# EAGLE board working (EAGLE 9.6.0), part 1 of 4
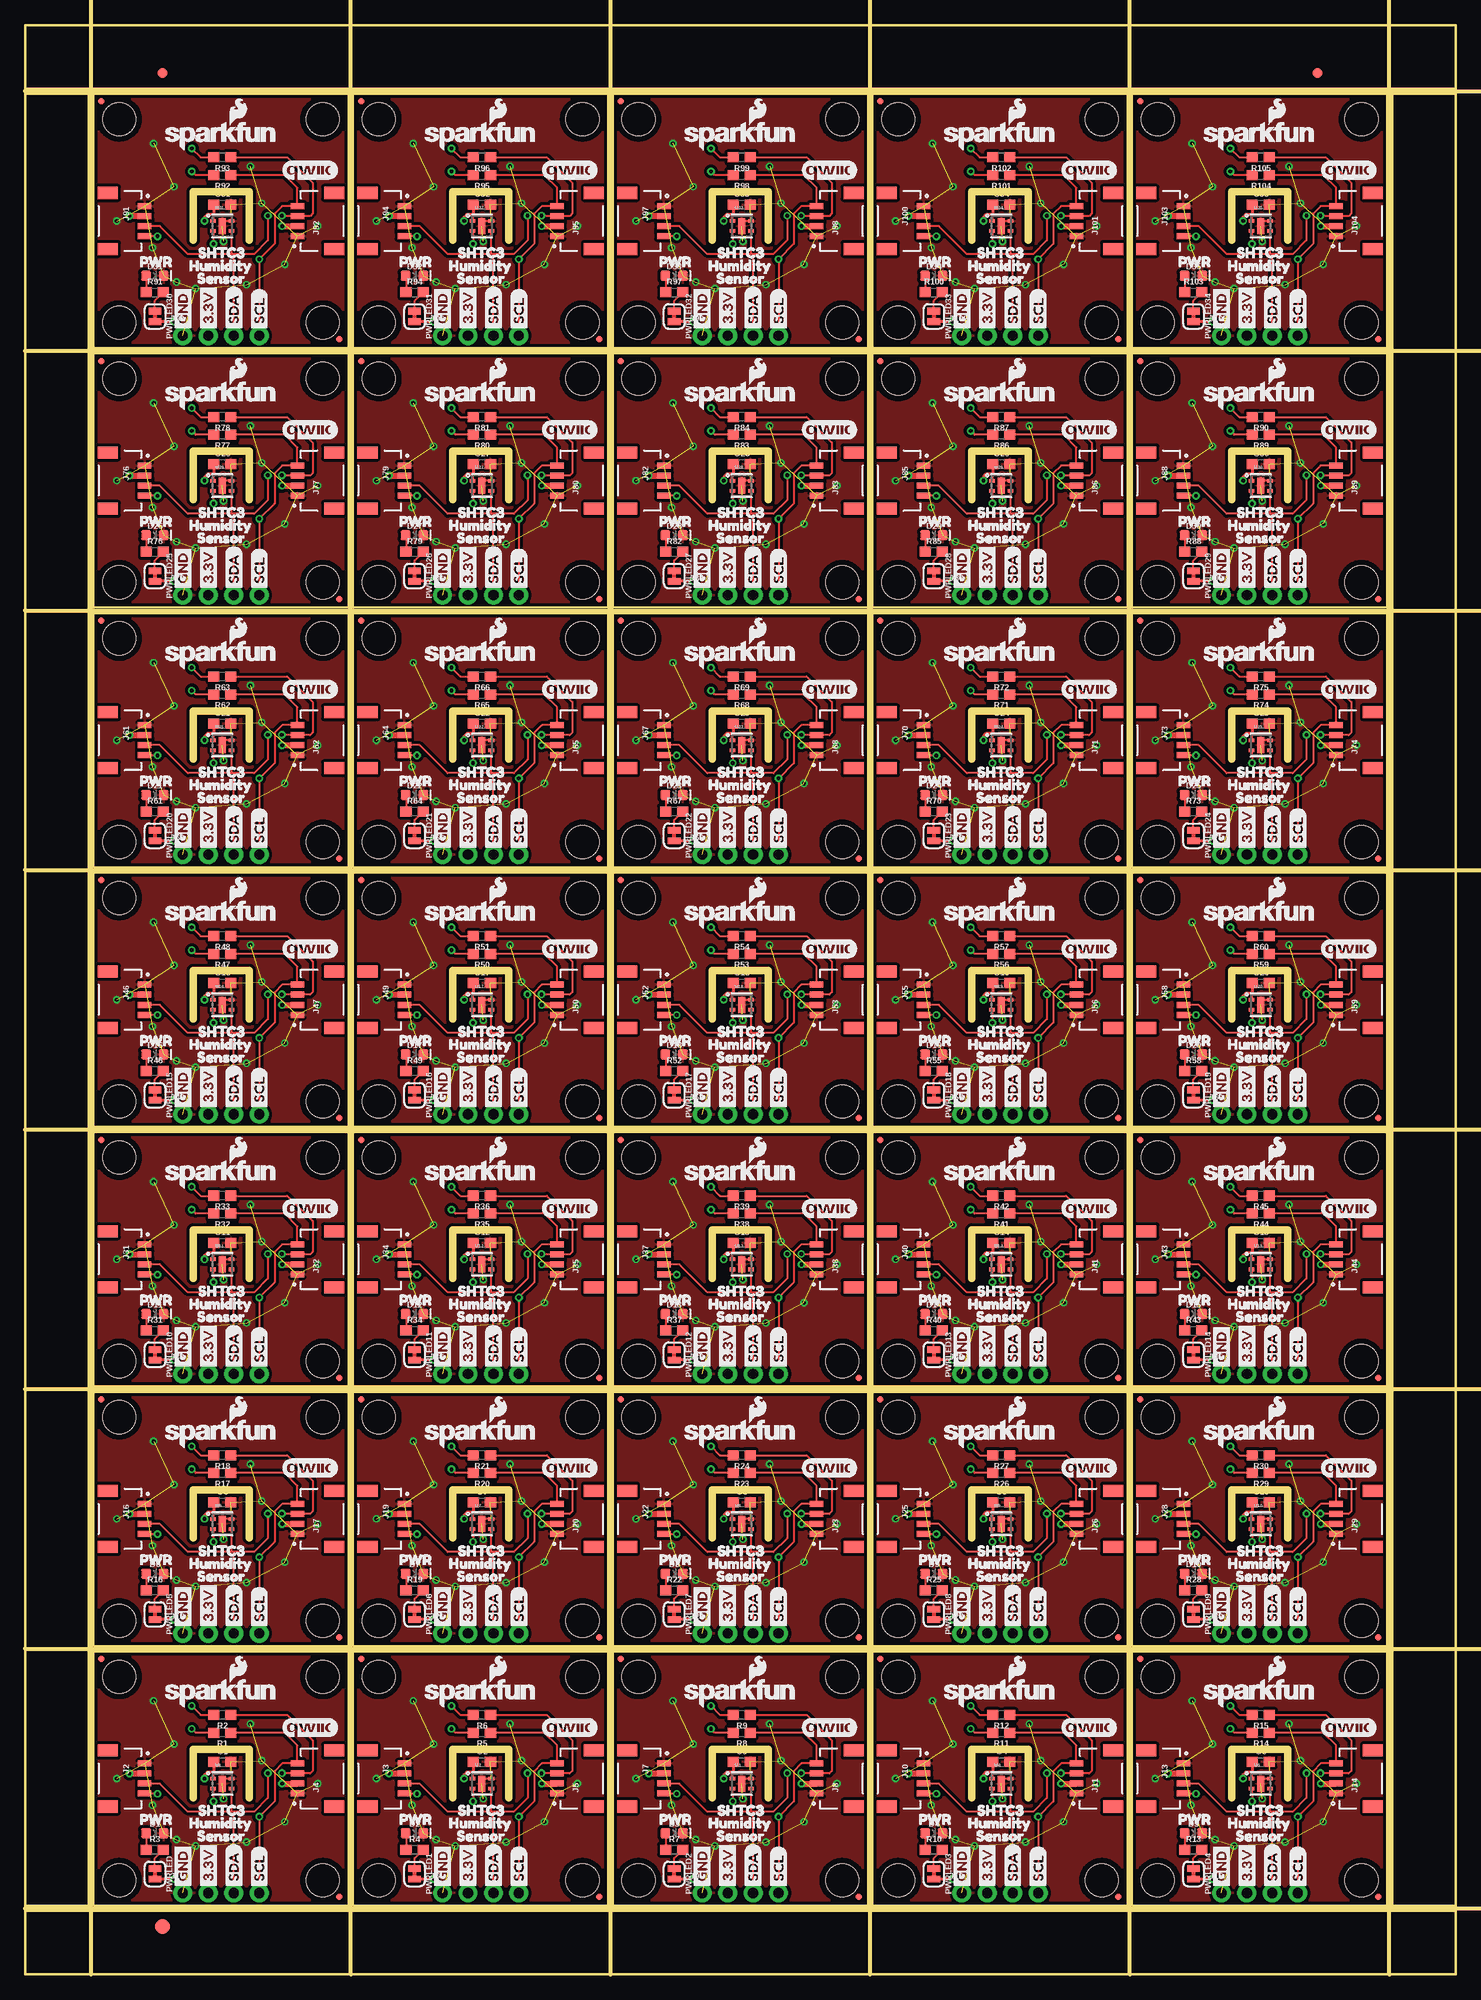
[diagram p0: board, top side]
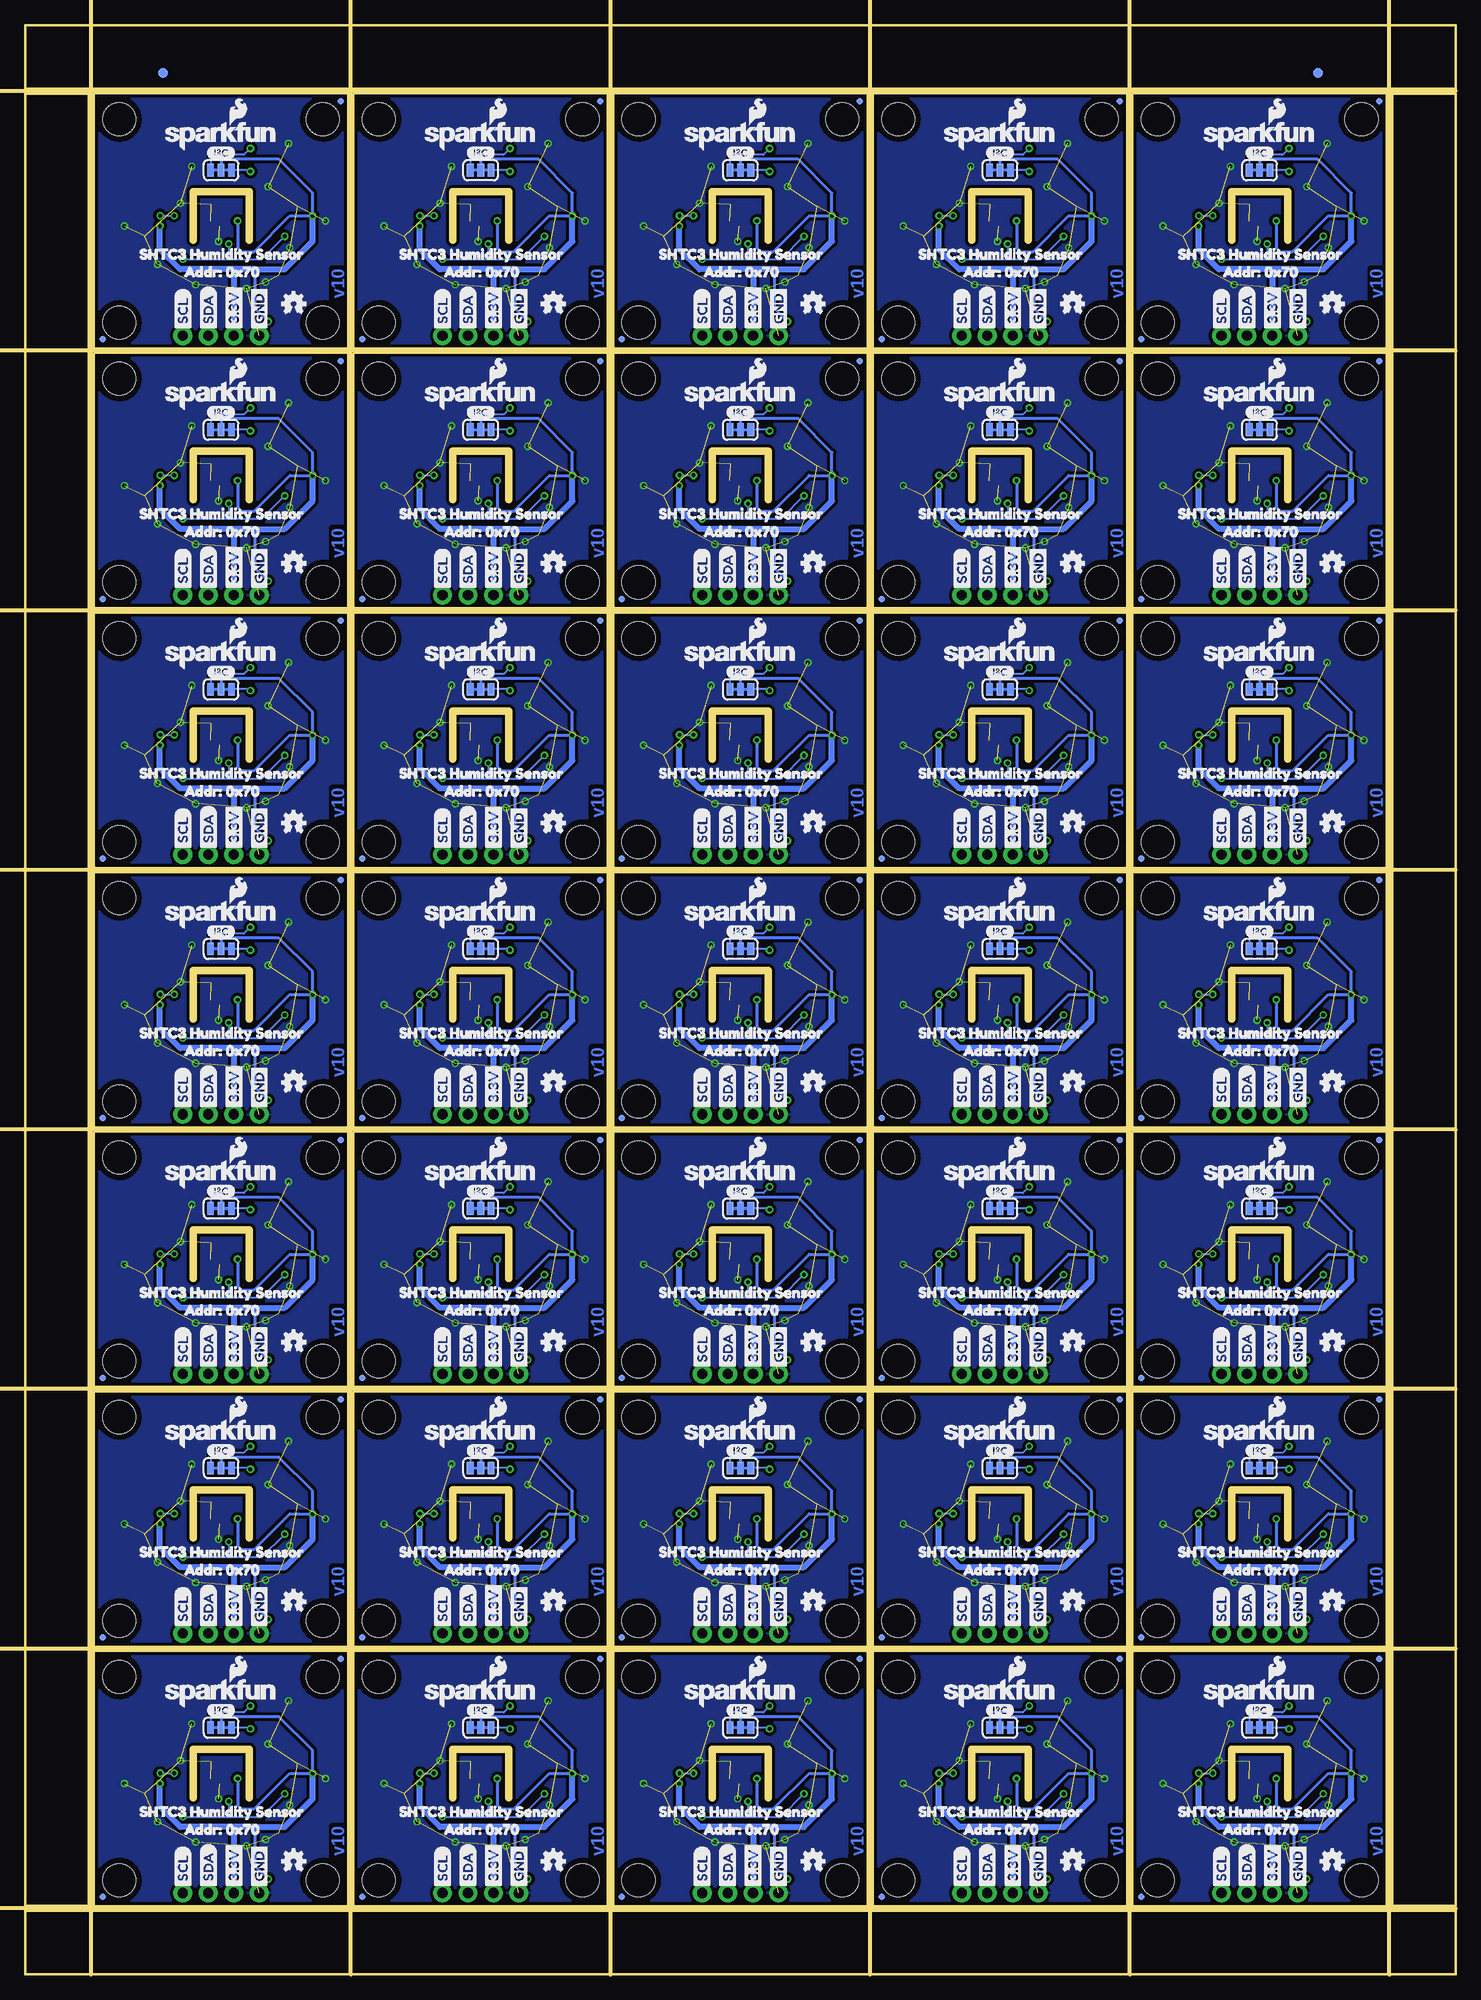
[diagram p1: board, bottom side, seen from below]

Size 142.75 x 194.56 mm. Coordinates in mm from the lower left corner, seen from the top.
Outline: 6.86,6.86 6.86,32.26 32.26,32.26 32.26,6.86 6.86,6.86
Outline: 32.77,6.86 32.77,32.26 58.17,32.26 58.17,6.86 32.77,6.86
Outline: 58.67,6.86 58.67,32.26 84.07,32.26 84.07,6.86 58.67,6.86
Outline: 84.58,6.86 84.58,32.26 109.98,32.26 109.98,6.86 84.58,6.86
Outline: 110.49,6.86 110.49,32.26 135.89,32.26 135.89,6.86 110.49,6.86
Outline: 6.86,32.77 6.86,58.17 32.26,58.17 32.26,32.77 6.86,32.77
Outline: 32.77,32.77 32.77,58.17 58.17,58.17 58.17,32.77 32.77,32.77
Outline: 58.67,32.77 58.67,58.17 84.07,58.17 84.07,32.77 58.67,32.77
Outline: 84.58,32.77 84.58,58.17 109.98,58.17 109.98,32.77 84.58,32.77
Outline: 110.49,32.77 110.49,58.17 135.89,58.17 135.89,32.77 110.49,32.77
Outline: 6.86,58.67 6.86,84.07 32.26,84.07 32.26,58.67 6.86,58.67
Outline: 32.77,58.67 32.77,84.07 58.17,84.07 58.17,58.67 32.77,58.67
Outline: 58.67,58.67 58.67,84.07 84.07,84.07 84.07,58.67 58.67,58.67
Outline: 84.58,58.67 84.58,84.07 109.98,84.07 109.98,58.67 84.58,58.67
Outline: 110.49,58.67 110.49,84.07 135.89,84.07 135.89,58.67 110.49,58.67
Outline: 6.86,84.58 6.86,109.98 32.26,109.98 32.26,84.58 6.86,84.58
Outline: 32.77,84.58 32.77,109.98 58.17,109.98 58.17,84.58 32.77,84.58
Outline: 58.67,84.58 58.67,109.98 84.07,109.98 84.07,84.58 58.67,84.58
Outline: 84.58,84.58 84.58,109.98 109.98,109.98 109.98,84.58 84.58,84.58
Outline: 110.49,84.58 110.49,109.98 135.89,109.98 135.89,84.58 110.49,84.58
Outline: 6.86,110.49 6.86,135.89 32.26,135.89 32.26,110.49 6.86,110.49
Outline: 32.77,110.49 32.77,135.89 58.17,135.89 58.17,110.49 32.77,110.49
Outline: 58.67,110.49 58.67,135.89 84.07,135.89 84.07,110.49 58.67,110.49
Outline: 84.58,110.49 84.58,135.89 109.98,135.89 109.98,110.49 84.58,110.49
Outline: 110.49,110.49 110.49,135.89 135.89,135.89 135.89,110.49 110.49,110.49
Outline: 6.86,136.4 6.86,161.8 32.26,161.8 32.26,136.4 6.86,136.4
Outline: 32.77,136.4 32.77,161.8 58.17,161.8 58.17,136.4 32.77,136.4
Outline: 58.67,136.4 58.67,161.8 84.07,161.8 84.07,136.4 58.67,136.4
Outline: 84.58,136.4 84.58,161.8 109.98,161.8 109.98,136.4 84.58,136.4
Outline: 110.49,136.4 110.49,161.8 135.89,161.8 135.89,136.4 110.49,136.4
Outline: 6.86,162.31 6.86,187.71 32.26,187.71 32.26,162.31 6.86,162.31
Outline: 32.77,162.31 32.77,187.71 58.17,187.71 58.17,162.31 32.77,162.31
Outline: 58.67,162.31 58.67,187.71 84.07,187.71 84.07,162.31 58.67,162.31
Outline: 84.58,162.31 84.58,187.71 109.98,187.71 109.98,162.31 84.58,162.31
Outline: 110.49,162.31 110.49,187.71 135.89,187.71 135.89,162.31 110.49,162.31
Outline: 0,6.35 142.75,6.35 142.75,0 0,0 0,6.35
Outline: 136.4,187.71 142.75,187.71 142.75,6.86 136.4,6.86 136.4,187.71
Outline: 0,194.56 142.75,194.56 142.75,188.21 0,188.21 0,194.56
Outline: 0,187.71 6.35,187.71 6.35,6.86 0,6.86 0,187.71
Copper layers (1*16): Top 0.035mm / dielectric 1.5mm / Bottom 0.035mm
Design rules "SHTC3": minimum track width 7mil, minimum drill 15mil, track to track 7mil, track to pad 7mil, pad to pad 7mil, via to via 7mil, smd to smd 7mil, copper to edge 7mil, drill to drill 7mil, minimum pad ring 7mil, minimum via ring 7mil, stop-mask expansion 4mil, vias tented up to drill 25mil, thermal gap 10mil
tRestrict: 105 lines
bRestrict: 105 lines
Milling: 119 lines

## Footprints (pad centres in the part's own frame; a part is rotated, then mirrored left to right if it is on the bottom)
0603 = smd 1.1 x 1: 1 -0.85,0; 2 0.85,0
LED-0603 = smd 1 x 1: A -0.877,0; C 0.877,0
FIDUCIAL-1X2 = smd 1 x 1: 1 0,0
FIDUCIAL-1.5X3 = smd 1.5 x 1.5: 1 0,0
SMT-JUMPER_3_2-NC_TRACE_SILK = smd 0.66 x 1.27: 1 -1.041,0; 2 0,0; 3 1.041,0
1X04_NO_SILK = drill 1.016 pad 1.88: 1 0,0; 2 2.54,0; 3 5.08,0; 4 7.62,0
JST04_1MM_RA = smd 0.6 x 1.35: 1 -1.5,0; 2 -0.5,0; 3 0.5,0; 4 1.5,0 | smd 1.2 x 2: NC1 2.8,-3.675; NC2 -2.8,-3.675
MICRO-FIDUCIAL = smd 0.635 x 0.635: 1 0,0
STAND-OFF = hole 3.302: 0,0
SMT-JUMPER_2_NC_TRACE_SILK = smd 0.66 x 1.27: 1 -0.521,0; 2 0.521,0
SHTC3 = smd 0.55 x 0.35: 1 -0.925,0.5; 2 -0.925,-0.5; 3 0.925,-0.5; 4 0.925,0.5 | smd 0.7 x 1.6: 5 0,0

## Placement (x,y rotation side)
C1  0.1uF  [0603]  19.68,21.21 0 top
C2  0.1uF  [0603]  45.59,21.21 0 top
C3  0.1uF  [0603]  71.5,21.21 0 top
C4  0.1uF  [0603]  97.41,21.21 0 top
C5  0.1uF  [0603]  123.32,21.21 0 top
C6  0.1uF  [0603]  19.68,47.12 0 top
C7  0.1uF  [0603]  45.59,47.12 0 top
C8  0.1uF  [0603]  71.5,47.12 0 top
C9  0.1uF  [0603]  97.41,47.12 0 top
C10  0.1uF  [0603]  123.32,47.12 0 top
C11  0.1uF  [0603]  19.68,73.03 0 top
C12  0.1uF  [0603]  45.59,73.03 0 top
C13  0.1uF  [0603]  71.5,73.03 0 top
C14  0.1uF  [0603]  97.41,73.03 0 top
C15  0.1uF  [0603]  123.32,73.03 0 top
C16  0.1uF  [0603]  19.68,98.93 0 top
C17  0.1uF  [0603]  45.59,98.93 0 top
C18  0.1uF  [0603]  71.5,98.93 0 top
C19  0.1uF  [0603]  97.41,98.93 0 top
C20  0.1uF  [0603]  123.32,98.93 0 top
C21  0.1uF  [0603]  19.68,124.84 0 top
C22  0.1uF  [0603]  45.59,124.84 0 top
C23  0.1uF  [0603]  71.5,124.84 0 top
C24  0.1uF  [0603]  97.41,124.84 0 top
C25  0.1uF  [0603]  123.32,124.84 0 top
C26  0.1uF  [0603]  19.68,150.75 0 top
C27  0.1uF  [0603]  45.59,150.75 0 top
C28  0.1uF  [0603]  71.5,150.75 0 top
C29  0.1uF  [0603]  97.41,150.75 0 top
C30  0.1uF  [0603]  123.32,150.75 0 top
C31  0.1uF  [0603]  19.68,176.66 0 top
C32  0.1uF  [0603]  45.59,176.66 0 top
C33  0.1uF  [0603]  71.5,176.66 0 top
C34  0.1uF  [0603]  97.41,176.66 0 top
C35  0.1uF  [0603]  123.32,176.66 0 top
D1  RED  [LED-0603]  12.95,14.1 0 top
D2  RED  [LED-0603]  38.86,14.1 0 top
D3  RED  [LED-0603]  64.77,14.1 0 top
D4  RED  [LED-0603]  90.68,14.1 0 top
D5  RED  [LED-0603]  116.59,14.1 0 top
D6  RED  [LED-0603]  12.95,40 0 top
D7  RED  [LED-0603]  38.86,40 0 top
D8  RED  [LED-0603]  64.77,40 0 top
D9  RED  [LED-0603]  90.68,40 0 top
D10  RED  [LED-0603]  116.59,40 0 top
D11  RED  [LED-0603]  12.95,65.91 0 top
D12  RED  [LED-0603]  38.86,65.91 0 top
D13  RED  [LED-0603]  64.77,65.91 0 top
D14  RED  [LED-0603]  90.68,65.91 0 top
D15  RED  [LED-0603]  116.59,65.91 0 top
D16  RED  [LED-0603]  12.95,91.82 0 top
D17  RED  [LED-0603]  38.86,91.82 0 top
D18  RED  [LED-0603]  64.77,91.82 0 top
D19  RED  [LED-0603]  90.68,91.82 0 top
D20  RED  [LED-0603]  116.59,91.82 0 top
D21  RED  [LED-0603]  12.95,117.73 0 top
D22  RED  [LED-0603]  38.86,117.73 0 top
D23  RED  [LED-0603]  64.77,117.73 0 top
D24  RED  [LED-0603]  90.68,117.73 0 top
D25  RED  [LED-0603]  116.59,117.73 0 top
D26  RED  [LED-0603]  12.95,143.64 0 top
D27  RED  [LED-0603]  38.86,143.64 0 top
D28  RED  [LED-0603]  64.77,143.64 0 top
D29  RED  [LED-0603]  90.68,143.64 0 top
D30  RED  [LED-0603]  116.59,143.64 0 top
D31  RED  [LED-0603]  12.95,169.55 0 top
D32  RED  [LED-0603]  38.86,169.55 0 top
D33  RED  [LED-0603]  64.77,169.55 0 top
D34  RED  [LED-0603]  90.68,169.55 0 top
D35  RED  [LED-0603]  116.59,169.55 0 top
E$1  [FIDUCIAL-1X2]  13.72,189.8 0 top
E$2  [FIDUCIAL-1X2]  13.72,189.8 0 bottom
E$3  [FIDUCIAL-1X2]  128.97,189.8 0 top
E$4  [FIDUCIAL-1X2]  128.97,189.8 0 bottom
E$5  [FIDUCIAL-1.5X3]  13.72,4.76 0 top
I2C  JUMPER-SMT_3_2-NC_TRACE_SILK  [SMT-JUMPER_3_2-NC_TRACE_SILK]  19.56,24.64 0 bottom
I2C1  JUMPER-SMT_3_2-NC_TRACE_SILK  [SMT-JUMPER_3_2-NC_TRACE_SILK]  45.47,24.64 0 bottom
I2C2  JUMPER-SMT_3_2-NC_TRACE_SILK  [SMT-JUMPER_3_2-NC_TRACE_SILK]  71.37,24.64 0 bottom
I2C3  JUMPER-SMT_3_2-NC_TRACE_SILK  [SMT-JUMPER_3_2-NC_TRACE_SILK]  97.28,24.64 0 bottom
I2C4  JUMPER-SMT_3_2-NC_TRACE_SILK  [SMT-JUMPER_3_2-NC_TRACE_SILK]  123.19,24.64 0 bottom
I2C5  JUMPER-SMT_3_2-NC_TRACE_SILK  [SMT-JUMPER_3_2-NC_TRACE_SILK]  19.56,50.55 0 bottom
I2C6  JUMPER-SMT_3_2-NC_TRACE_SILK  [SMT-JUMPER_3_2-NC_TRACE_SILK]  45.47,50.55 0 bottom
I2C7  JUMPER-SMT_3_2-NC_TRACE_SILK  [SMT-JUMPER_3_2-NC_TRACE_SILK]  71.37,50.55 0 bottom
I2C8  JUMPER-SMT_3_2-NC_TRACE_SILK  [SMT-JUMPER_3_2-NC_TRACE_SILK]  97.28,50.55 0 bottom
I2C9  JUMPER-SMT_3_2-NC_TRACE_SILK  [SMT-JUMPER_3_2-NC_TRACE_SILK]  123.19,50.55 0 bottom
I2C10  JUMPER-SMT_3_2-NC_TRACE_SILK  [SMT-JUMPER_3_2-NC_TRACE_SILK]  19.56,76.45 0 bottom
I2C11  JUMPER-SMT_3_2-NC_TRACE_SILK  [SMT-JUMPER_3_2-NC_TRACE_SILK]  45.47,76.45 0 bottom
I2C12  JUMPER-SMT_3_2-NC_TRACE_SILK  [SMT-JUMPER_3_2-NC_TRACE_SILK]  71.37,76.45 0 bottom
I2C13  JUMPER-SMT_3_2-NC_TRACE_SILK  [SMT-JUMPER_3_2-NC_TRACE_SILK]  97.28,76.45 0 bottom
I2C14  JUMPER-SMT_3_2-NC_TRACE_SILK  [SMT-JUMPER_3_2-NC_TRACE_SILK]  123.19,76.45 0 bottom
I2C15  JUMPER-SMT_3_2-NC_TRACE_SILK  [SMT-JUMPER_3_2-NC_TRACE_SILK]  19.56,102.36 0 bottom
I2C16  JUMPER-SMT_3_2-NC_TRACE_SILK  [SMT-JUMPER_3_2-NC_TRACE_SILK]  45.47,102.36 0 bottom
I2C17  JUMPER-SMT_3_2-NC_TRACE_SILK  [SMT-JUMPER_3_2-NC_TRACE_SILK]  71.37,102.36 0 bottom
I2C18  JUMPER-SMT_3_2-NC_TRACE_SILK  [SMT-JUMPER_3_2-NC_TRACE_SILK]  97.28,102.36 0 bottom
I2C19  JUMPER-SMT_3_2-NC_TRACE_SILK  [SMT-JUMPER_3_2-NC_TRACE_SILK]  123.19,102.36 0 bottom
I2C20  JUMPER-SMT_3_2-NC_TRACE_SILK  [SMT-JUMPER_3_2-NC_TRACE_SILK]  19.56,128.27 0 bottom
I2C21  JUMPER-SMT_3_2-NC_TRACE_SILK  [SMT-JUMPER_3_2-NC_TRACE_SILK]  45.47,128.27 0 bottom
I2C22  JUMPER-SMT_3_2-NC_TRACE_SILK  [SMT-JUMPER_3_2-NC_TRACE_SILK]  71.37,128.27 0 bottom
I2C23  JUMPER-SMT_3_2-NC_TRACE_SILK  [SMT-JUMPER_3_2-NC_TRACE_SILK]  97.28,128.27 0 bottom
I2C24  JUMPER-SMT_3_2-NC_TRACE_SILK  [SMT-JUMPER_3_2-NC_TRACE_SILK]  123.19,128.27 0 bottom
I2C25  JUMPER-SMT_3_2-NC_TRACE_SILK  [SMT-JUMPER_3_2-NC_TRACE_SILK]  19.56,154.18 0 bottom
I2C26  JUMPER-SMT_3_2-NC_TRACE_SILK  [SMT-JUMPER_3_2-NC_TRACE_SILK]  45.47,154.18 0 bottom
I2C27  JUMPER-SMT_3_2-NC_TRACE_SILK  [SMT-JUMPER_3_2-NC_TRACE_SILK]  71.37,154.18 0 bottom
I2C28  JUMPER-SMT_3_2-NC_TRACE_SILK  [SMT-JUMPER_3_2-NC_TRACE_SILK]  97.28,154.18 0 bottom
I2C29  JUMPER-SMT_3_2-NC_TRACE_SILK  [SMT-JUMPER_3_2-NC_TRACE_SILK]  123.19,154.18 0 bottom
I2C30  JUMPER-SMT_3_2-NC_TRACE_SILK  [SMT-JUMPER_3_2-NC_TRACE_SILK]  19.56,180.09 0 bottom
I2C31  JUMPER-SMT_3_2-NC_TRACE_SILK  [SMT-JUMPER_3_2-NC_TRACE_SILK]  45.47,180.09 0 bottom
I2C32  JUMPER-SMT_3_2-NC_TRACE_SILK  [SMT-JUMPER_3_2-NC_TRACE_SILK]  71.37,180.09 0 bottom
I2C33  JUMPER-SMT_3_2-NC_TRACE_SILK  [SMT-JUMPER_3_2-NC_TRACE_SILK]  97.28,180.09 0 bottom
I2C34  JUMPER-SMT_3_2-NC_TRACE_SILK  [SMT-JUMPER_3_2-NC_TRACE_SILK]  123.19,180.09 0 bottom
J1  [1X04_NO_SILK]  15.75,8.13 0 top
J2  QWIIC_RIGHT_ANGLE  [JST04_1MM_RA]  11.94,19.56 270 top
J3  QWIIC_RIGHT_ANGLE  [JST04_1MM_RA]  37.85,19.56 270 top
J4  QWIIC_RIGHT_ANGLE  [JST04_1MM_RA]  27.18,19.56 90 top
J5  QWIIC_RIGHT_ANGLE  [JST04_1MM_RA]  53.09,19.56 90 top
J6  [1X04_NO_SILK]  41.66,8.13 0 top
J7  QWIIC_RIGHT_ANGLE  [JST04_1MM_RA]  63.75,19.56 270 top
J8  QWIIC_RIGHT_ANGLE  [JST04_1MM_RA]  78.99,19.56 90 top
J9  [1X04_NO_SILK]  67.56,8.13 0 top
J10  QWIIC_RIGHT_ANGLE  [JST04_1MM_RA]  89.66,19.56 270 top
J11  QWIIC_RIGHT_ANGLE  [JST04_1MM_RA]  104.9,19.56 90 top
J12  [1X04_NO_SILK]  93.47,8.13 0 top
J13  QWIIC_RIGHT_ANGLE  [JST04_1MM_RA]  115.57,19.56 270 top
J14  QWIIC_RIGHT_ANGLE  [JST04_1MM_RA]  130.81,19.56 90 top
J15  [1X04_NO_SILK]  119.38,8.13 0 top
J16  QWIIC_RIGHT_ANGLE  [JST04_1MM_RA]  11.94,45.47 270 top
J17  QWIIC_RIGHT_ANGLE  [JST04_1MM_RA]  27.18,45.47 90 top
J18  [1X04_NO_SILK]  15.75,34.04 0 top
J19  QWIIC_RIGHT_ANGLE  [JST04_1MM_RA]  37.85,45.47 270 top
J20  QWIIC_RIGHT_ANGLE  [JST04_1MM_RA]  53.09,45.47 90 top
J21  [1X04_NO_SILK]  41.66,34.04 0 top
J22  QWIIC_RIGHT_ANGLE  [JST04_1MM_RA]  63.75,45.47 270 top
J23  QWIIC_RIGHT_ANGLE  [JST04_1MM_RA]  78.99,45.47 90 top
J24  [1X04_NO_SILK]  67.56,34.04 0 top
J25  QWIIC_RIGHT_ANGLE  [JST04_1MM_RA]  89.66,45.47 270 top
J26  QWIIC_RIGHT_ANGLE  [JST04_1MM_RA]  104.9,45.47 90 top
J27  [1X04_NO_SILK]  93.47,34.04 0 top
J28  QWIIC_RIGHT_ANGLE  [JST04_1MM_RA]  115.57,45.47 270 top
J29  QWIIC_RIGHT_ANGLE  [JST04_1MM_RA]  130.81,45.47 90 top
J30  [1X04_NO_SILK]  119.38,34.04 0 top
J31  QWIIC_RIGHT_ANGLE  [JST04_1MM_RA]  11.94,71.37 270 top
J32  QWIIC_RIGHT_ANGLE  [JST04_1MM_RA]  27.18,71.37 90 top
J33  [1X04_NO_SILK]  15.75,59.94 0 top
J34  QWIIC_RIGHT_ANGLE  [JST04_1MM_RA]  37.85,71.37 270 top
J35  QWIIC_RIGHT_ANGLE  [JST04_1MM_RA]  53.09,71.37 90 top
J36  [1X04_NO_SILK]  41.66,59.94 0 top
J37  QWIIC_RIGHT_ANGLE  [JST04_1MM_RA]  63.75,71.37 270 top
J38  QWIIC_RIGHT_ANGLE  [JST04_1MM_RA]  78.99,71.37 90 top
J39  [1X04_NO_SILK]  67.56,59.94 0 top
J40  QWIIC_RIGHT_ANGLE  [JST04_1MM_RA]  89.66,71.37 270 top
J41  QWIIC_RIGHT_ANGLE  [JST04_1MM_RA]  104.9,71.37 90 top
J42  [1X04_NO_SILK]  93.47,59.94 0 top
J43  QWIIC_RIGHT_ANGLE  [JST04_1MM_RA]  115.57,71.37 270 top
J44  QWIIC_RIGHT_ANGLE  [JST04_1MM_RA]  130.81,71.37 90 top
J45  [1X04_NO_SILK]  119.38,59.94 0 top
J46  QWIIC_RIGHT_ANGLE  [JST04_1MM_RA]  11.94,97.28 270 top
J47  QWIIC_RIGHT_ANGLE  [JST04_1MM_RA]  27.18,97.28 90 top
J48  [1X04_NO_SILK]  15.75,85.85 0 top
J49  QWIIC_RIGHT_ANGLE  [JST04_1MM_RA]  37.85,97.28 270 top
J50  QWIIC_RIGHT_ANGLE  [JST04_1MM_RA]  53.09,97.28 90 top
J51  [1X04_NO_SILK]  41.66,85.85 0 top
J52  QWIIC_RIGHT_ANGLE  [JST04_1MM_RA]  63.75,97.28 270 top
J53  QWIIC_RIGHT_ANGLE  [JST04_1MM_RA]  78.99,97.28 90 top
J54  [1X04_NO_SILK]  67.56,85.85 0 top
J55  QWIIC_RIGHT_ANGLE  [JST04_1MM_RA]  89.66,97.28 270 top
J56  QWIIC_RIGHT_ANGLE  [JST04_1MM_RA]  104.9,97.28 90 top
J57  [1X04_NO_SILK]  93.47,85.85 0 top
J58  QWIIC_RIGHT_ANGLE  [JST04_1MM_RA]  115.57,97.28 270 top
J59  QWIIC_RIGHT_ANGLE  [JST04_1MM_RA]  130.81,97.28 90 top
J60  [1X04_NO_SILK]  119.38,85.85 0 top
J61  QWIIC_RIGHT_ANGLE  [JST04_1MM_RA]  11.94,123.19 270 top
J62  QWIIC_RIGHT_ANGLE  [JST04_1MM_RA]  27.18,123.19 90 top
J63  [1X04_NO_SILK]  15.75,111.76 0 top
J64  QWIIC_RIGHT_ANGLE  [JST04_1MM_RA]  37.85,123.19 270 top
J65  QWIIC_RIGHT_ANGLE  [JST04_1MM_RA]  53.09,123.19 90 top
J66  [1X04_NO_SILK]  41.66,111.76 0 top
J67  QWIIC_RIGHT_ANGLE  [JST04_1MM_RA]  63.75,123.19 270 top
J68  QWIIC_RIGHT_ANGLE  [JST04_1MM_RA]  78.99,123.19 90 top
J69  [1X04_NO_SILK]  67.56,111.76 0 top
J70  QWIIC_RIGHT_ANGLE  [JST04_1MM_RA]  89.66,123.19 270 top
J71  QWIIC_RIGHT_ANGLE  [JST04_1MM_RA]  104.9,123.19 90 top
J72  [1X04_NO_SILK]  93.47,111.76 0 top
J73  QWIIC_RIGHT_ANGLE  [JST04_1MM_RA]  115.57,123.19 270 top
J74  QWIIC_RIGHT_ANGLE  [JST04_1MM_RA]  130.81,123.19 90 top
J75  [1X04_NO_SILK]  119.38,111.76 0 top
J76  QWIIC_RIGHT_ANGLE  [JST04_1MM_RA]  11.94,149.1 270 top
J77  QWIIC_RIGHT_ANGLE  [JST04_1MM_RA]  27.18,149.1 90 top
J78  [1X04_NO_SILK]  15.75,137.67 0 top
J79  QWIIC_RIGHT_ANGLE  [JST04_1MM_RA]  37.85,149.1 270 top
J80  QWIIC_RIGHT_ANGLE  [JST04_1MM_RA]  53.09,149.1 90 top
J81  [1X04_NO_SILK]  41.66,137.67 0 top
J82  QWIIC_RIGHT_ANGLE  [JST04_1MM_RA]  63.75,149.1 270 top
J83  QWIIC_RIGHT_ANGLE  [JST04_1MM_RA]  78.99,149.1 90 top
J84  [1X04_NO_SILK]  67.56,137.67 0 top
J85  QWIIC_RIGHT_ANGLE  [JST04_1MM_RA]  89.66,149.1 270 top
J86  QWIIC_RIGHT_ANGLE  [JST04_1MM_RA]  104.9,149.1 90 top
J87  [1X04_NO_SILK]  93.47,137.67 0 top
J88  QWIIC_RIGHT_ANGLE  [JST04_1MM_RA]  115.57,149.1 270 top
J89  QWIIC_RIGHT_ANGLE  [JST04_1MM_RA]  130.81,149.1 90 top
J90  [1X04_NO_SILK]  119.38,137.67 0 top
J91  QWIIC_RIGHT_ANGLE  [JST04_1MM_RA]  11.94,175.01 270 top
J92  QWIIC_RIGHT_ANGLE  [JST04_1MM_RA]  27.18,175.01 90 top
J93  [1X04_NO_SILK]  15.75,163.58 0 top
J94  QWIIC_RIGHT_ANGLE  [JST04_1MM_RA]  37.85,175.01 270 top
J95  QWIIC_RIGHT_ANGLE  [JST04_1MM_RA]  53.09,175.01 90 top
J96  [1X04_NO_SILK]  41.66,163.58 0 top
J97  QWIIC_RIGHT_ANGLE  [JST04_1MM_RA]  63.75,175.01 270 top
J98  QWIIC_RIGHT_ANGLE  [JST04_1MM_RA]  78.99,175.01 90 top
J99  [1X04_NO_SILK]  67.56,163.58 0 top
J100  QWIIC_RIGHT_ANGLE  [JST04_1MM_RA]  89.66,175.01 270 top
J101  QWIIC_RIGHT_ANGLE  [JST04_1MM_RA]  104.9,175.01 90 top
J102  [1X04_NO_SILK]  93.47,163.58 0 top
J103  QWIIC_RIGHT_ANGLE  [JST04_1MM_RA]  115.57,175.01 270 top
J104  QWIIC_RIGHT_ANGLE  [JST04_1MM_RA]  130.81,175.01 90 top
J105  [1X04_NO_SILK]  119.38,163.58 0 top
JP1  FIDUCIALUFIDUCIAL  [MICRO-FIDUCIAL]  7.62,31.5 0 bottom
JP2  FIDUCIALUFIDUCIAL  [MICRO-FIDUCIAL]  31.37,7.75 0 top
JP3  STAND-OFF  [STAND-OFF]  9.4,29.72 0 top
JP4  STAND-OFF  [STAND-OFF]  29.72,29.72 0 top
JP5  FIDUCIALUFIDUCIAL  [MICRO-FIDUCIAL]  31.37,7.75 0 bottom
JP6  FIDUCIALUFIDUCIAL  [MICRO-FIDUCIAL]  7.62,31.5 0 top
JP7  STAND-OFF  [STAND-OFF]  9.4,9.4 0 top
JP8  STAND-OFF  [STAND-OFF]  29.72,9.4 0 top
JP9  STAND-OFF  [STAND-OFF]  35.31,29.72 0 top
JP10  STAND-OFF  [STAND-OFF]  55.63,29.72 0 top
JP11  FIDUCIALUFIDUCIAL  [MICRO-FIDUCIAL]  57.28,7.75 0 top
JP12  FIDUCIALUFIDUCIAL  [MICRO-FIDUCIAL]  33.53,31.5 0 top
JP13  FIDUCIALUFIDUCIAL  [MICRO-FIDUCIAL]  33.53,31.5 0 bottom
JP14  FIDUCIALUFIDUCIAL  [MICRO-FIDUCIAL]  57.28,7.75 0 bottom
JP15  STAND-OFF  [STAND-OFF]  35.31,9.4 0 top
JP16  STAND-OFF  [STAND-OFF]  55.63,9.4 0 top
JP17  STAND-OFF  [STAND-OFF]  61.21,29.72 0 top
JP18  STAND-OFF  [STAND-OFF]  81.53,29.72 0 top
JP19  FIDUCIALUFIDUCIAL  [MICRO-FIDUCIAL]  83.19,7.75 0 top
JP20  FIDUCIALUFIDUCIAL  [MICRO-FIDUCIAL]  59.44,31.5 0 top
JP21  FIDUCIALUFIDUCIAL  [MICRO-FIDUCIAL]  59.44,31.5 0 bottom
JP22  FIDUCIALUFIDUCIAL  [MICRO-FIDUCIAL]  83.19,7.75 0 bottom
JP23  STAND-OFF  [STAND-OFF]  61.21,9.4 0 top
JP24  STAND-OFF  [STAND-OFF]  81.53,9.4 0 top
JP25  STAND-OFF  [STAND-OFF]  87.12,29.72 0 top
JP26  STAND-OFF  [STAND-OFF]  107.44,29.72 0 top
JP27  FIDUCIALUFIDUCIAL  [MICRO-FIDUCIAL]  109.09,7.75 0 top
JP28  FIDUCIALUFIDUCIAL  [MICRO-FIDUCIAL]  85.34,31.5 0 top
JP29  FIDUCIALUFIDUCIAL  [MICRO-FIDUCIAL]  85.34,31.5 0 bottom
JP30  FIDUCIALUFIDUCIAL  [MICRO-FIDUCIAL]  109.09,7.75 0 bottom
JP31  STAND-OFF  [STAND-OFF]  87.12,9.4 0 top
JP32  STAND-OFF  [STAND-OFF]  107.44,9.4 0 top
JP33  STAND-OFF  [STAND-OFF]  113.03,29.72 0 top
JP34  STAND-OFF  [STAND-OFF]  133.35,29.72 0 top
JP35  FIDUCIALUFIDUCIAL  [MICRO-FIDUCIAL]  135,7.75 0 top
JP36  FIDUCIALUFIDUCIAL  [MICRO-FIDUCIAL]  111.25,31.5 0 top
JP37  FIDUCIALUFIDUCIAL  [MICRO-FIDUCIAL]  111.25,31.5 0 bottom
JP38  FIDUCIALUFIDUCIAL  [MICRO-FIDUCIAL]  135,7.75 0 bottom
JP39  STAND-OFF  [STAND-OFF]  113.03,9.4 0 top
JP40  STAND-OFF  [STAND-OFF]  133.35,9.4 0 top
JP41  STAND-OFF  [STAND-OFF]  9.4,55.63 0 top
JP42  STAND-OFF  [STAND-OFF]  29.72,55.63 0 top
JP43  FIDUCIALUFIDUCIAL  [MICRO-FIDUCIAL]  31.37,33.66 0 top
JP44  FIDUCIALUFIDUCIAL  [MICRO-FIDUCIAL]  7.62,57.4 0 top
JP45  FIDUCIALUFIDUCIAL  [MICRO-FIDUCIAL]  7.62,57.4 0 bottom
JP46  FIDUCIALUFIDUCIAL  [MICRO-FIDUCIAL]  31.37,33.66 0 bottom
JP47  STAND-OFF  [STAND-OFF]  9.4,35.31 0 top
JP48  STAND-OFF  [STAND-OFF]  29.72,35.31 0 top
JP49  STAND-OFF  [STAND-OFF]  35.31,55.63 0 top
JP50  STAND-OFF  [STAND-OFF]  55.63,55.63 0 top
JP51  FIDUCIALUFIDUCIAL  [MICRO-FIDUCIAL]  57.28,33.66 0 top
JP52  FIDUCIALUFIDUCIAL  [MICRO-FIDUCIAL]  33.53,57.4 0 top
JP53  FIDUCIALUFIDUCIAL  [MICRO-FIDUCIAL]  33.53,57.4 0 bottom
JP54  FIDUCIALUFIDUCIAL  [MICRO-FIDUCIAL]  57.28,33.66 0 bottom
JP55  STAND-OFF  [STAND-OFF]  35.31,35.31 0 top
JP56  STAND-OFF  [STAND-OFF]  55.63,35.31 0 top
JP57  STAND-OFF  [STAND-OFF]  61.21,55.63 0 top
JP58  STAND-OFF  [STAND-OFF]  81.53,55.63 0 top
JP59  FIDUCIALUFIDUCIAL  [MICRO-FIDUCIAL]  83.19,33.66 0 top
JP60  FIDUCIALUFIDUCIAL  [MICRO-FIDUCIAL]  59.44,57.4 0 top
JP61  FIDUCIALUFIDUCIAL  [MICRO-FIDUCIAL]  59.44,57.4 0 bottom
JP62  FIDUCIALUFIDUCIAL  [MICRO-FIDUCIAL]  83.19,33.66 0 bottom
JP63  STAND-OFF  [STAND-OFF]  61.21,35.31 0 top
JP64  STAND-OFF  [STAND-OFF]  81.53,35.31 0 top
JP65  STAND-OFF  [STAND-OFF]  87.12,55.63 0 top
JP66  STAND-OFF  [STAND-OFF]  107.44,55.63 0 top
JP67  FIDUCIALUFIDUCIAL  [MICRO-FIDUCIAL]  109.09,33.66 0 top
JP68  FIDUCIALUFIDUCIAL  [MICRO-FIDUCIAL]  85.34,57.4 0 top
JP69  FIDUCIALUFIDUCIAL  [MICRO-FIDUCIAL]  85.34,57.4 0 bottom
JP70  FIDUCIALUFIDUCIAL  [MICRO-FIDUCIAL]  109.09,33.66 0 bottom
JP71  STAND-OFF  [STAND-OFF]  87.12,35.31 0 top
JP72  STAND-OFF  [STAND-OFF]  107.44,35.31 0 top
JP73  STAND-OFF  [STAND-OFF]  113.03,55.63 0 top
JP74  STAND-OFF  [STAND-OFF]  133.35,55.63 0 top
JP75  FIDUCIALUFIDUCIAL  [MICRO-FIDUCIAL]  135,33.66 0 top
JP76  FIDUCIALUFIDUCIAL  [MICRO-FIDUCIAL]  111.25,57.4 0 top
JP77  FIDUCIALUFIDUCIAL  [MICRO-FIDUCIAL]  111.25,57.4 0 bottom
JP78  FIDUCIALUFIDUCIAL  [MICRO-FIDUCIAL]  135,33.66 0 bottom
JP79  STAND-OFF  [STAND-OFF]  113.03,35.31 0 top
JP80  STAND-OFF  [STAND-OFF]  133.35,35.31 0 top
JP81  STAND-OFF  [STAND-OFF]  9.4,81.53 0 top
JP82  STAND-OFF  [STAND-OFF]  29.72,81.53 0 top
JP83  FIDUCIALUFIDUCIAL  [MICRO-FIDUCIAL]  31.37,59.56 0 top
JP84  FIDUCIALUFIDUCIAL  [MICRO-FIDUCIAL]  7.62,83.31 0 top
JP85  FIDUCIALUFIDUCIAL  [MICRO-FIDUCIAL]  7.62,83.31 0 bottom
JP86  FIDUCIALUFIDUCIAL  [MICRO-FIDUCIAL]  31.37,59.56 0 bottom
JP87  STAND-OFF  [STAND-OFF]  9.4,61.21 0 top
JP88  STAND-OFF  [STAND-OFF]  29.72,61.21 0 top
JP89  STAND-OFF  [STAND-OFF]  35.31,81.53 0 top
JP90  STAND-OFF  [STAND-OFF]  55.63,81.53 0 top
JP91  FIDUCIALUFIDUCIAL  [MICRO-FIDUCIAL]  57.28,59.56 0 top
JP92  FIDUCIALUFIDUCIAL  [MICRO-FIDUCIAL]  33.53,83.31 0 top
JP93  FIDUCIALUFIDUCIAL  [MICRO-FIDUCIAL]  33.53,83.31 0 bottom
JP94  FIDUCIALUFIDUCIAL  [MICRO-FIDUCIAL]  57.28,59.56 0 bottom
JP95  STAND-OFF  [STAND-OFF]  35.31,61.21 0 top
JP96  STAND-OFF  [STAND-OFF]  55.63,61.21 0 top
JP97  STAND-OFF  [STAND-OFF]  61.21,81.53 0 top
JP98  STAND-OFF  [STAND-OFF]  81.53,81.53 0 top
JP99  FIDUCIALUFIDUCIAL  [MICRO-FIDUCIAL]  83.19,59.56 0 top
JP100  FIDUCIALUFIDUCIAL  [MICRO-FIDUCIAL]  59.44,83.31 0 top
JP101  FIDUCIALUFIDUCIAL  [MICRO-FIDUCIAL]  59.44,83.31 0 bottom
JP102  FIDUCIALUFIDUCIAL  [MICRO-FIDUCIAL]  83.19,59.56 0 bottom
JP103  STAND-OFF  [STAND-OFF]  61.21,61.21 0 top
JP104  STAND-OFF  [STAND-OFF]  81.53,61.21 0 top
JP105  STAND-OFF  [STAND-OFF]  87.12,81.53 0 top
JP106  STAND-OFF  [STAND-OFF]  107.44,81.53 0 top
JP107  FIDUCIALUFIDUCIAL  [MICRO-FIDUCIAL]  109.09,59.56 0 top
JP108  FIDUCIALUFIDUCIAL  [MICRO-FIDUCIAL]  85.34,83.31 0 top
JP109  FIDUCIALUFIDUCIAL  [MICRO-FIDUCIAL]  85.34,83.31 0 bottom
JP110  FIDUCIALUFIDUCIAL  [MICRO-FIDUCIAL]  109.09,59.56 0 bottom
JP111  STAND-OFF  [STAND-OFF]  87.12,61.21 0 top
JP112  STAND-OFF  [STAND-OFF]  107.44,61.21 0 top
JP113  STAND-OFF  [STAND-OFF]  113.03,81.53 0 top
JP114  STAND-OFF  [STAND-OFF]  133.35,81.53 0 top
JP115  FIDUCIALUFIDUCIAL  [MICRO-FIDUCIAL]  135,59.56 0 top
JP116  FIDUCIALUFIDUCIAL  [MICRO-FIDUCIAL]  111.25,83.31 0 top
JP117  FIDUCIALUFIDUCIAL  [MICRO-FIDUCIAL]  111.25,83.31 0 bottom
JP118  FIDUCIALUFIDUCIAL  [MICRO-FIDUCIAL]  135,59.56 0 bottom
JP119  STAND-OFF  [STAND-OFF]  113.03,61.21 0 top
JP120  STAND-OFF  [STAND-OFF]  133.35,61.21 0 top
JP121  STAND-OFF  [STAND-OFF]  9.4,107.44 0 top
JP122  STAND-OFF  [STAND-OFF]  29.72,107.44 0 top
JP123  FIDUCIALUFIDUCIAL  [MICRO-FIDUCIAL]  31.37,85.47 0 top
JP124  FIDUCIALUFIDUCIAL  [MICRO-FIDUCIAL]  7.62,109.22 0 top
JP125  FIDUCIALUFIDUCIAL  [MICRO-FIDUCIAL]  7.62,109.22 0 bottom
JP126  FIDUCIALUFIDUCIAL  [MICRO-FIDUCIAL]  31.37,85.47 0 bottom
JP127  STAND-OFF  [STAND-OFF]  9.4,87.12 0 top
JP128  STAND-OFF  [STAND-OFF]  29.72,87.12 0 top
JP129  STAND-OFF  [STAND-OFF]  35.31,107.44 0 top
JP130  STAND-OFF  [STAND-OFF]  55.63,107.44 0 top
JP131  FIDUCIALUFIDUCIAL  [MICRO-FIDUCIAL]  57.28,85.47 0 top
JP132  FIDUCIALUFIDUCIAL  [MICRO-FIDUCIAL]  33.53,109.22 0 top
JP133  FIDUCIALUFIDUCIAL  [MICRO-FIDUCIAL]  33.53,109.22 0 bottom
JP134  FIDUCIALUFIDUCIAL  [MICRO-FIDUCIAL]  57.28,85.47 0 bottom
JP135  STAND-OFF  [STAND-OFF]  35.31,87.12 0 top
JP136  STAND-OFF  [STAND-OFF]  55.63,87.12 0 top
JP137  STAND-OFF  [STAND-OFF]  61.21,107.44 0 top
JP138  STAND-OFF  [STAND-OFF]  81.53,107.44 0 top
JP139  FIDUCIALUFIDUCIAL  [MICRO-FIDUCIAL]  83.19,85.47 0 top
JP140  FIDUCIALUFIDUCIAL  [MICRO-FIDUCIAL]  59.44,109.22 0 top
JP141  FIDUCIALUFIDUCIAL  [MICRO-FIDUCIAL]  59.44,109.22 0 bottom
JP142  FIDUCIALUFIDUCIAL  [MICRO-FIDUCIAL]  83.19,85.47 0 bottom
JP143  STAND-OFF  [STAND-OFF]  61.21,87.12 0 top
JP144  STAND-OFF  [STAND-OFF]  81.53,87.12 0 top
JP145  STAND-OFF  [STAND-OFF]  87.12,107.44 0 top
JP146  STAND-OFF  [STAND-OFF]  107.44,107.44 0 top
JP147  FIDUCIALUFIDUCIAL  [MICRO-FIDUCIAL]  109.09,85.47 0 top
JP148  FIDUCIALUFIDUCIAL  [MICRO-FIDUCIAL]  85.34,109.22 0 top
JP149  FIDUCIALUFIDUCIAL  [MICRO-FIDUCIAL]  85.34,109.22 0 bottom
JP150  FIDUCIALUFIDUCIAL  [MICRO-FIDUCIAL]  109.09,85.47 0 bottom
JP151  STAND-OFF  [STAND-OFF]  87.12,87.12 0 top
JP152  STAND-OFF  [STAND-OFF]  107.44,87.12 0 top
JP153  STAND-OFF  [STAND-OFF]  113.03,107.44 0 top
JP154  STAND-OFF  [STAND-OFF]  133.35,107.44 0 top
JP155  FIDUCIALUFIDUCIAL  [MICRO-FIDUCIAL]  135,85.47 0 top
JP156  FIDUCIALUFIDUCIAL  [MICRO-FIDUCIAL]  111.25,109.22 0 top
JP157  FIDUCIALUFIDUCIAL  [MICRO-FIDUCIAL]  111.25,109.22 0 bottom
JP158  FIDUCIALUFIDUCIAL  [MICRO-FIDUCIAL]  135,85.47 0 bottom
JP159  STAND-OFF  [STAND-OFF]  113.03,87.12 0 top
JP160  STAND-OFF  [STAND-OFF]  133.35,87.12 0 top
JP161  STAND-OFF  [STAND-OFF]  9.4,133.35 0 top
JP162  STAND-OFF  [STAND-OFF]  29.72,133.35 0 top
JP163  FIDUCIALUFIDUCIAL  [MICRO-FIDUCIAL]  31.37,111.38 0 top
JP164  FIDUCIALUFIDUCIAL  [MICRO-FIDUCIAL]  7.62,135.13 0 top
JP165  FIDUCIALUFIDUCIAL  [MICRO-FIDUCIAL]  7.62,135.13 0 bottom
JP166  FIDUCIALUFIDUCIAL  [MICRO-FIDUCIAL]  31.37,111.38 0 bottom
JP167  STAND-OFF  [STAND-OFF]  9.4,113.03 0 top
JP168  STAND-OFF  [STAND-OFF]  29.72,113.03 0 top
JP169  STAND-OFF  [STAND-OFF]  35.31,133.35 0 top
JP170  STAND-OFF  [STAND-OFF]  55.63,133.35 0 top
JP171  FIDUCIALUFIDUCIAL  [MICRO-FIDUCIAL]  57.28,111.38 0 top
JP172  FIDUCIALUFIDUCIAL  [MICRO-FIDUCIAL]  33.53,135.13 0 top
JP173  FIDUCIALUFIDUCIAL  [MICRO-FIDUCIAL]  33.53,135.13 0 bottom
JP174  FIDUCIALUFIDUCIAL  [MICRO-FIDUCIAL]  57.28,111.38 0 bottom
JP175  STAND-OFF  [STAND-OFF]  35.31,113.03 0 top
JP176  STAND-OFF  [STAND-OFF]  55.63,113.03 0 top
JP177  STAND-OFF  [STAND-OFF]  61.21,133.35 0 top
JP178  STAND-OFF  [STAND-OFF]  81.53,133.35 0 top
JP179  FIDUCIALUFIDUCIAL  [MICRO-FIDUCIAL]  83.19,111.38 0 top
JP180  FIDUCIALUFIDUCIAL  [MICRO-FIDUCIAL]  59.44,135.13 0 top
JP181  FIDUCIALUFIDUCIAL  [MICRO-FIDUCIAL]  59.44,135.13 0 bottom
JP182  FIDUCIALUFIDUCIAL  [MICRO-FIDUCIAL]  83.19,111.38 0 bottom
JP183  STAND-OFF  [STAND-OFF]  61.21,113.03 0 top
JP184  STAND-OFF  [STAND-OFF]  81.53,113.03 0 top
JP185  STAND-OFF  [STAND-OFF]  87.12,133.35 0 top
JP186  STAND-OFF  [STAND-OFF]  107.44,133.35 0 top
JP187  FIDUCIALUFIDUCIAL  [MICRO-FIDUCIAL]  109.09,111.38 0 top
JP188  FIDUCIALUFIDUCIAL  [MICRO-FIDUCIAL]  85.34,135.13 0 top
JP189  FIDUCIALUFIDUCIAL  [MICRO-FIDUCIAL]  85.34,135.13 0 bottom
JP190  FIDUCIALUFIDUCIAL  [MICRO-FIDUCIAL]  109.09,111.38 0 bottom
JP191  STAND-OFF  [STAND-OFF]  87.12,113.03 0 top
JP192  STAND-OFF  [STAND-OFF]  107.44,113.03 0 top
JP193  STAND-OFF  [STAND-OFF]  113.03,133.35 0 top
JP194  STAND-OFF  [STAND-OFF]  133.35,133.35 0 top
JP195  FIDUCIALUFIDUCIAL  [MICRO-FIDUCIAL]  135,111.38 0 top
JP196  FIDUCIALUFIDUCIAL  [MICRO-FIDUCIAL]  111.25,135.13 0 top
JP197  FIDUCIALUFIDUCIAL  [MICRO-FIDUCIAL]  111.25,135.13 0 bottom
JP198  FIDUCIALUFIDUCIAL  [MICRO-FIDUCIAL]  135,111.38 0 bottom
JP199  STAND-OFF  [STAND-OFF]  113.03,113.03 0 top
JP200  STAND-OFF  [STAND-OFF]  133.35,113.03 0 top
JP201  STAND-OFF  [STAND-OFF]  9.4,159.26 0 top
JP202  STAND-OFF  [STAND-OFF]  29.72,159.26 0 top
JP203  FIDUCIALUFIDUCIAL  [MICRO-FIDUCIAL]  31.37,137.29 0 top
JP204  FIDUCIALUFIDUCIAL  [MICRO-FIDUCIAL]  7.62,161.04 0 top
JP205  FIDUCIALUFIDUCIAL  [MICRO-FIDUCIAL]  7.62,161.04 0 bottom
JP206  FIDUCIALUFIDUCIAL  [MICRO-FIDUCIAL]  31.37,137.29 0 bottom
JP207  STAND-OFF  [STAND-OFF]  9.4,138.94 0 top
JP208  STAND-OFF  [STAND-OFF]  29.72,138.94 0 top
JP209  STAND-OFF  [STAND-OFF]  35.31,159.26 0 top
JP210  STAND-OFF  [STAND-OFF]  55.63,159.26 0 top
JP211  FIDUCIALUFIDUCIAL  [MICRO-FIDUCIAL]  57.28,137.29 0 top
JP212  FIDUCIALUFIDUCIAL  [MICRO-FIDUCIAL]  33.53,161.04 0 top
JP213  FIDUCIALUFIDUCIAL  [MICRO-FIDUCIAL]  33.53,161.04 0 bottom
JP214  FIDUCIALUFIDUCIAL  [MICRO-FIDUCIAL]  57.28,137.29 0 bottom
JP215  STAND-OFF  [STAND-OFF]  35.31,138.94 0 top
JP216  STAND-OFF  [STAND-OFF]  55.63,138.94 0 top
JP217  STAND-OFF  [STAND-OFF]  61.21,159.26 0 top
JP218  STAND-OFF  [STAND-OFF]  81.53,159.26 0 top
JP219  FIDUCIALUFIDUCIAL  [MICRO-FIDUCIAL]  83.19,137.29 0 top
JP220  FIDUCIALUFIDUCIAL  [MICRO-FIDUCIAL]  59.44,161.04 0 top
JP221  FIDUCIALUFIDUCIAL  [MICRO-FIDUCIAL]  59.44,161.04 0 bottom
JP222  FIDUCIALUFIDUCIAL  [MICRO-FIDUCIAL]  83.19,137.29 0 bottom
JP223  STAND-OFF  [STAND-OFF]  61.21,138.94 0 top
JP224  STAND-OFF  [STAND-OFF]  81.53,138.94 0 top
JP225  STAND-OFF  [STAND-OFF]  87.12,159.26 0 top
JP226  STAND-OFF  [STAND-OFF]  107.44,159.26 0 top
JP227  FIDUCIALUFIDUCIAL  [MICRO-FIDUCIAL]  109.09,137.29 0 top
JP228  FIDUCIALUFIDUCIAL  [MICRO-FIDUCIAL]  85.34,161.04 0 top
JP229  FIDUCIALUFIDUCIAL  [MICRO-FIDUCIAL]  85.34,161.04 0 bottom
JP230  FIDUCIALUFIDUCIAL  [MICRO-FIDUCIAL]  109.09,137.29 0 bottom
JP231  STAND-OFF  [STAND-OFF]  87.12,138.94 0 top
JP232  STAND-OFF  [STAND-OFF]  107.44,138.94 0 top
JP233  STAND-OFF  [STAND-OFF]  113.03,159.26 0 top
JP234  STAND-OFF  [STAND-OFF]  133.35,159.26 0 top
JP235  FIDUCIALUFIDUCIAL  [MICRO-FIDUCIAL]  135,137.29 0 top
JP236  FIDUCIALUFIDUCIAL  [MICRO-FIDUCIAL]  111.25,161.04 0 top
JP237  FIDUCIALUFIDUCIAL  [MICRO-FIDUCIAL]  111.25,161.04 0 bottom
JP238  FIDUCIALUFIDUCIAL  [MICRO-FIDUCIAL]  135,137.29 0 bottom
JP239  STAND-OFF  [STAND-OFF]  113.03,138.94 0 top
JP240  STAND-OFF  [STAND-OFF]  133.35,138.94 0 top
JP241  STAND-OFF  [STAND-OFF]  9.4,185.17 0 top
JP242  STAND-OFF  [STAND-OFF]  29.72,185.17 0 top
JP243  FIDUCIALUFIDUCIAL  [MICRO-FIDUCIAL]  31.37,163.19 0 top
JP244  FIDUCIALUFIDUCIAL  [MICRO-FIDUCIAL]  7.62,186.94 0 top
JP245  FIDUCIALUFIDUCIAL  [MICRO-FIDUCIAL]  7.62,186.94 0 bottom
JP246  FIDUCIALUFIDUCIAL  [MICRO-FIDUCIAL]  31.37,163.19 0 bottom
JP247  STAND-OFF  [STAND-OFF]  9.4,164.85 0 top
JP248  STAND-OFF  [STAND-OFF]  29.72,164.85 0 top
JP249  STAND-OFF  [STAND-OFF]  35.31,185.17 0 top
JP250  STAND-OFF  [STAND-OFF]  55.63,185.17 0 top
JP251  FIDUCIALUFIDUCIAL  [MICRO-FIDUCIAL]  57.28,163.19 0 top
JP252  FIDUCIALUFIDUCIAL  [MICRO-FIDUCIAL]  33.53,186.94 0 top
JP253  FIDUCIALUFIDUCIAL  [MICRO-FIDUCIAL]  33.53,186.94 0 bottom
JP254  FIDUCIALUFIDUCIAL  [MICRO-FIDUCIAL]  57.28,163.19 0 bottom
JP255  STAND-OFF  [STAND-OFF]  35.31,164.85 0 top
JP256  STAND-OFF  [STAND-OFF]  55.63,164.85 0 top
JP257  STAND-OFF  [STAND-OFF]  61.21,185.17 0 top
JP258  STAND-OFF  [STAND-OFF]  81.53,185.17 0 top
JP259  FIDUCIALUFIDUCIAL  [MICRO-FIDUCIAL]  83.19,163.19 0 top
JP260  FIDUCIALUFIDUCIAL  [MICRO-FIDUCIAL]  59.44,186.94 0 top
JP261  FIDUCIALUFIDUCIAL  [MICRO-FIDUCIAL]  59.44,186.94 0 bottom
JP262  FIDUCIALUFIDUCIAL  [MICRO-FIDUCIAL]  83.19,163.19 0 bottom
JP263  STAND-OFF  [STAND-OFF]  61.21,164.85 0 top
JP264  STAND-OFF  [STAND-OFF]  81.53,164.85 0 top
JP265  STAND-OFF  [STAND-OFF]  87.12,185.17 0 top
JP266  STAND-OFF  [STAND-OFF]  107.44,185.17 0 top
JP267  FIDUCIALUFIDUCIAL  [MICRO-FIDUCIAL]  109.09,163.19 0 top
JP268  FIDUCIALUFIDUCIAL  [MICRO-FIDUCIAL]  85.34,186.94 0 top
JP269  FIDUCIALUFIDUCIAL  [MICRO-FIDUCIAL]  85.34,186.94 0 bottom
JP270  FIDUCIALUFIDUCIAL  [MICRO-FIDUCIAL]  109.09,163.19 0 bottom
JP271  STAND-OFF  [STAND-OFF]  87.12,164.85 0 top
JP272  STAND-OFF  [STAND-OFF]  107.44,164.85 0 top
JP273  STAND-OFF  [STAND-OFF]  113.03,185.17 0 top
JP274  STAND-OFF  [STAND-OFF]  133.35,185.17 0 top
JP275  FIDUCIALUFIDUCIAL  [MICRO-FIDUCIAL]  135,163.19 0 top
JP276  FIDUCIALUFIDUCIAL  [MICRO-FIDUCIAL]  111.25,186.94 0 top
JP277  FIDUCIALUFIDUCIAL  [MICRO-FIDUCIAL]  111.25,186.94 0 bottom
JP278  FIDUCIALUFIDUCIAL  [MICRO-FIDUCIAL]  135,163.19 0 bottom
JP279  STAND-OFF  [STAND-OFF]  113.03,164.85 0 top
JP280  STAND-OFF  [STAND-OFF]  133.35,164.85 0 top
LOGO1  OSHW-LOGOMINI  [OSHW-LOGO-MINI]  12.32,11.3 0 bottom
LOGO2  SFE_LOGO_NAME_FLAME.1_INCH  [SFE_LOGO_NAME_FLAME_.1]  19.56,28.07 0 top
LOGO3  SFE_LOGO_NAME_FLAME.1_INCH  [SFE_LOGO_NAME_FLAME_.1]  19.56,28.07 0 bottom
LOGO4  REVISION  [REVISION]  5.59,-14.73 0 top  (outside the outline)
LOGO5  OSHW-LOGOMINI  [OSHW-LOGO-MINI]  38.23,11.3 0 bottom
LOGO6  SFE_LOGO_NAME_FLAME.1_INCH  [SFE_LOGO_NAME_FLAME_.1]  45.47,28.07 0 top
LOGO7  SFE_LOGO_NAME_FLAME.1_INCH  [SFE_LOGO_NAME_FLAME_.1]  45.47,28.07 0 bottom
LOGO8  REVISION  [REVISION]  31.5,-14.73 0 top  (outside the outline)
LOGO9  OSHW-LOGOMINI  [OSHW-LOGO-MINI]  64.14,11.3 0 bottom
LOGO10  SFE_LOGO_NAME_FLAME.1_INCH  [SFE_LOGO_NAME_FLAME_.1]  71.37,28.07 0 top
LOGO11  SFE_LOGO_NAME_FLAME.1_INCH  [SFE_LOGO_NAME_FLAME_.1]  71.37,28.07 0 bottom
LOGO12  REVISION  [REVISION]  57.4,-14.73 0 top  (outside the outline)
LOGO13  OSHW-LOGOMINI  [OSHW-LOGO-MINI]  90.04,11.3 0 bottom
LOGO14  SFE_LOGO_NAME_FLAME.1_INCH  [SFE_LOGO_NAME_FLAME_.1]  97.28,28.07 0 top
LOGO15  SFE_LOGO_NAME_FLAME.1_INCH  [SFE_LOGO_NAME_FLAME_.1]  97.28,28.07 0 bottom
LOGO16  REVISION  [REVISION]  83.31,-14.73 0 top  (outside the outline)
LOGO17  OSHW-LOGOMINI  [OSHW-LOGO-MINI]  115.95,11.3 0 bottom
LOGO18  SFE_LOGO_NAME_FLAME.1_INCH  [SFE_LOGO_NAME_FLAME_.1]  123.19,28.07 0 top
LOGO19  SFE_LOGO_NAME_FLAME.1_INCH  [SFE_LOGO_NAME_FLAME_.1]  123.19,28.07 0 bottom
LOGO20  REVISION  [REVISION]  109.22,-14.73 0 top  (outside the outline)
LOGO21  OSHW-LOGOMINI  [OSHW-LOGO-MINI]  12.32,37.21 0 bottom
LOGO22  SFE_LOGO_NAME_FLAME.1_INCH  [SFE_LOGO_NAME_FLAME_.1]  19.56,53.97 0 top
LOGO23  SFE_LOGO_NAME_FLAME.1_INCH  [SFE_LOGO_NAME_FLAME_.1]  19.56,53.97 0 bottom
LOGO24  REVISION  [REVISION]  5.59,11.18 0 top
LOGO25  OSHW-LOGOMINI  [OSHW-LOGO-MINI]  38.23,37.21 0 bottom
LOGO26  SFE_LOGO_NAME_FLAME.1_INCH  [SFE_LOGO_NAME_FLAME_.1]  45.47,53.97 0 top
LOGO27  SFE_LOGO_NAME_FLAME.1_INCH  [SFE_LOGO_NAME_FLAME_.1]  45.47,53.97 0 bottom
LOGO28  REVISION  [REVISION]  31.5,11.18 0 top
LOGO29  OSHW-LOGOMINI  [OSHW-LOGO-MINI]  64.14,37.21 0 bottom
LOGO30  SFE_LOGO_NAME_FLAME.1_INCH  [SFE_LOGO_NAME_FLAME_.1]  71.37,53.97 0 top
LOGO31  SFE_LOGO_NAME_FLAME.1_INCH  [SFE_LOGO_NAME_FLAME_.1]  71.37,53.97 0 bottom
LOGO32  REVISION  [REVISION]  57.4,11.18 0 top
LOGO33  OSHW-LOGOMINI  [OSHW-LOGO-MINI]  90.04,37.21 0 bottom
LOGO34  SFE_LOGO_NAME_FLAME.1_INCH  [SFE_LOGO_NAME_FLAME_.1]  97.28,53.97 0 top
LOGO35  SFE_LOGO_NAME_FLAME.1_INCH  [SFE_LOGO_NAME_FLAME_.1]  97.28,53.97 0 bottom
LOGO36  REVISION  [REVISION]  83.31,11.18 0 top
LOGO37  OSHW-LOGOMINI  [OSHW-LOGO-MINI]  115.95,37.21 0 bottom
LOGO38  SFE_LOGO_NAME_FLAME.1_INCH  [SFE_LOGO_NAME_FLAME_.1]  123.19,53.97 0 top
LOGO39  SFE_LOGO_NAME_FLAME.1_INCH  [SFE_LOGO_NAME_FLAME_.1]  123.19,53.97 0 bottom
LOGO40  REVISION  [REVISION]  109.22,11.18 0 top
LOGO41  OSHW-LOGOMINI  [OSHW-LOGO-MINI]  12.32,63.12 0 bottom
LOGO42  SFE_LOGO_NAME_FLAME.1_INCH  [SFE_LOGO_NAME_FLAME_.1]  19.56,79.88 0 top
LOGO43  SFE_LOGO_NAME_FLAME.1_INCH  [SFE_LOGO_NAME_FLAME_.1]  19.56,79.88 0 bottom
LOGO44  REVISION  [REVISION]  5.59,37.08 0 top
LOGO45  OSHW-LOGOMINI  [OSHW-LOGO-MINI]  38.23,63.12 0 bottom
LOGO46  SFE_LOGO_NAME_FLAME.1_INCH  [SFE_LOGO_NAME_FLAME_.1]  45.47,79.88 0 top
LOGO47  SFE_LOGO_NAME_FLAME.1_INCH  [SFE_LOGO_NAME_FLAME_.1]  45.47,79.88 0 bottom
LOGO48  REVISION  [REVISION]  31.5,37.08 0 top
LOGO49  OSHW-LOGOMINI  [OSHW-LOGO-MINI]  64.14,63.12 0 bottom
LOGO50  SFE_LOGO_NAME_FLAME.1_INCH  [SFE_LOGO_NAME_FLAME_.1]  71.37,79.88 0 top
LOGO51  SFE_LOGO_NAME_FLAME.1_INCH  [SFE_LOGO_NAME_FLAME_.1]  71.37,79.88 0 bottom
LOGO52  REVISION  [REVISION]  57.4,37.08 0 top
LOGO53  OSHW-LOGOMINI  [OSHW-LOGO-MINI]  90.04,63.12 0 bottom
LOGO54  SFE_LOGO_NAME_FLAME.1_INCH  [SFE_LOGO_NAME_FLAME_.1]  97.28,79.88 0 top
LOGO55  SFE_LOGO_NAME_FLAME.1_INCH  [SFE_LOGO_NAME_FLAME_.1]  97.28,79.88 0 bottom
LOGO56  REVISION  [REVISION]  83.31,37.08 0 top
LOGO57  OSHW-LOGOMINI  [OSHW-LOGO-MINI]  115.95,63.12 0 bottom
LOGO58  SFE_LOGO_NAME_FLAME.1_INCH  [SFE_LOGO_NAME_FLAME_.1]  123.19,79.88 0 top
LOGO59  SFE_LOGO_NAME_FLAME.1_INCH  [SFE_LOGO_NAME_FLAME_.1]  123.19,79.88 0 bottom
LOGO60  REVISION  [REVISION]  109.22,37.08 0 top
LOGO61  OSHW-LOGOMINI  [OSHW-LOGO-MINI]  12.32,89.03 0 bottom
LOGO62  SFE_LOGO_NAME_FLAME.1_INCH  [SFE_LOGO_NAME_FLAME_.1]  19.56,105.79 0 top
LOGO63  SFE_LOGO_NAME_FLAME.1_INCH  [SFE_LOGO_NAME_FLAME_.1]  19.56,105.79 0 bottom
LOGO64  REVISION  [REVISION]  5.59,62.99 0 top
LOGO65  OSHW-LOGOMINI  [OSHW-LOGO-MINI]  38.23,89.03 0 bottom
LOGO66  SFE_LOGO_NAME_FLAME.1_INCH  [SFE_LOGO_NAME_FLAME_.1]  45.47,105.79 0 top
LOGO67  SFE_LOGO_NAME_FLAME.1_INCH  [SFE_LOGO_NAME_FLAME_.1]  45.47,105.79 0 bottom
LOGO68  REVISION  [REVISION]  31.5,62.99 0 top
LOGO69  OSHW-LOGOMINI  [OSHW-LOGO-MINI]  64.14,89.03 0 bottom
LOGO70  SFE_LOGO_NAME_FLAME.1_INCH  [SFE_LOGO_NAME_FLAME_.1]  71.37,105.79 0 top
LOGO71  SFE_LOGO_NAME_FLAME.1_INCH  [SFE_LOGO_NAME_FLAME_.1]  71.37,105.79 0 bottom
LOGO72  REVISION  [REVISION]  57.4,62.99 0 top
LOGO73  OSHW-LOGOMINI  [OSHW-LOGO-MINI]  90.04,89.03 0 bottom
LOGO74  SFE_LOGO_NAME_FLAME.1_INCH  [SFE_LOGO_NAME_FLAME_.1]  97.28,105.79 0 top
LOGO75  SFE_LOGO_NAME_FLAME.1_INCH  [SFE_LOGO_NAME_FLAME_.1]  97.28,105.79 0 bottom
LOGO76  REVISION  [REVISION]  83.31,62.99 0 top
LOGO77  OSHW-LOGOMINI  [OSHW-LOGO-MINI]  115.95,89.03 0 bottom
LOGO78  SFE_LOGO_NAME_FLAME.1_INCH  [SFE_LOGO_NAME_FLAME_.1]  123.19,105.79 0 top
LOGO79  SFE_LOGO_NAME_FLAME.1_INCH  [SFE_LOGO_NAME_FLAME_.1]  123.19,105.79 0 bottom
LOGO80  REVISION  [REVISION]  109.22,62.99 0 top
LOGO81  OSHW-LOGOMINI  [OSHW-LOGO-MINI]  12.32,114.94 0 bottom
LOGO82  SFE_LOGO_NAME_FLAME.1_INCH  [SFE_LOGO_NAME_FLAME_.1]  19.56,131.7 0 top
LOGO83  SFE_LOGO_NAME_FLAME.1_INCH  [SFE_LOGO_NAME_FLAME_.1]  19.56,131.7 0 bottom
LOGO84  REVISION  [REVISION]  5.59,88.9 0 top
LOGO85  OSHW-LOGOMINI  [OSHW-LOGO-MINI]  38.23,114.94 0 bottom
LOGO86  SFE_LOGO_NAME_FLAME.1_INCH  [SFE_LOGO_NAME_FLAME_.1]  45.47,131.7 0 top
LOGO87  SFE_LOGO_NAME_FLAME.1_INCH  [SFE_LOGO_NAME_FLAME_.1]  45.47,131.7 0 bottom
LOGO88  REVISION  [REVISION]  31.5,88.9 0 top
LOGO89  OSHW-LOGOMINI  [OSHW-LOGO-MINI]  64.14,114.94 0 bottom
LOGO90  SFE_LOGO_NAME_FLAME.1_INCH  [SFE_LOGO_NAME_FLAME_.1]  71.37,131.7 0 top
LOGO91  SFE_LOGO_NAME_FLAME.1_INCH  [SFE_LOGO_NAME_FLAME_.1]  71.37,131.7 0 bottom
LOGO92  REVISION  [REVISION]  57.4,88.9 0 top
LOGO93  OSHW-LOGOMINI  [OSHW-LOGO-MINI]  90.04,114.94 0 bottom
LOGO94  SFE_LOGO_NAME_FLAME.1_INCH  [SFE_LOGO_NAME_FLAME_.1]  97.28,131.7 0 top
LOGO95  SFE_LOGO_NAME_FLAME.1_INCH  [SFE_LOGO_NAME_FLAME_.1]  97.28,131.7 0 bottom
LOGO96  REVISION  [REVISION]  83.31,88.9 0 top
LOGO97  OSHW-LOGOMINI  [OSHW-LOGO-MINI]  115.95,114.94 0 bottom
LOGO98  SFE_LOGO_NAME_FLAME.1_INCH  [SFE_LOGO_NAME_FLAME_.1]  123.19,131.7 0 top
LOGO99  SFE_LOGO_NAME_FLAME.1_INCH  [SFE_LOGO_NAME_FLAME_.1]  123.19,131.7 0 bottom
LOGO100  REVISION  [REVISION]  109.22,88.9 0 top
LOGO101  OSHW-LOGOMINI  [OSHW-LOGO-MINI]  12.32,140.84 0 bottom
LOGO102  SFE_LOGO_NAME_FLAME.1_INCH  [SFE_LOGO_NAME_FLAME_.1]  19.56,157.61 0 top
LOGO103  SFE_LOGO_NAME_FLAME.1_INCH  [SFE_LOGO_NAME_FLAME_.1]  19.56,157.61 0 bottom
LOGO104  REVISION  [REVISION]  5.59,114.81 0 top
LOGO105  OSHW-LOGOMINI  [OSHW-LOGO-MINI]  38.23,140.84 0 bottom
LOGO106  SFE_LOGO_NAME_FLAME.1_INCH  [SFE_LOGO_NAME_FLAME_.1]  45.47,157.61 0 top
LOGO107  SFE_LOGO_NAME_FLAME.1_INCH  [SFE_LOGO_NAME_FLAME_.1]  45.47,157.61 0 bottom
LOGO108  REVISION  [REVISION]  31.5,114.81 0 top
LOGO109  OSHW-LOGOMINI  [OSHW-LOGO-MINI]  64.14,140.84 0 bottom
LOGO110  SFE_LOGO_NAME_FLAME.1_INCH  [SFE_LOGO_NAME_FLAME_.1]  71.37,157.61 0 top
LOGO111  SFE_LOGO_NAME_FLAME.1_INCH  [SFE_LOGO_NAME_FLAME_.1]  71.37,157.61 0 bottom
LOGO112  REVISION  [REVISION]  57.4,114.81 0 top
LOGO113  OSHW-LOGOMINI  [OSHW-LOGO-MINI]  90.04,140.84 0 bottom
LOGO114  SFE_LOGO_NAME_FLAME.1_INCH  [SFE_LOGO_NAME_FLAME_.1]  97.28,157.61 0 top
LOGO115  SFE_LOGO_NAME_FLAME.1_INCH  [SFE_LOGO_NAME_FLAME_.1]  97.28,157.61 0 bottom
LOGO116  REVISION  [REVISION]  83.31,114.81 0 top
LOGO117  OSHW-LOGOMINI  [OSHW-LOGO-MINI]  115.95,140.84 0 bottom
LOGO118  SFE_LOGO_NAME_FLAME.1_INCH  [SFE_LOGO_NAME_FLAME_.1]  123.19,157.61 0 top
LOGO119  SFE_LOGO_NAME_FLAME.1_INCH  [SFE_LOGO_NAME_FLAME_.1]  123.19,157.61 0 bottom
LOGO120  REVISION  [REVISION]  109.22,114.81 0 top
LOGO121  OSHW-LOGOMINI  [OSHW-LOGO-MINI]  12.32,166.75 0 bottom
LOGO122  SFE_LOGO_NAME_FLAME.1_INCH  [SFE_LOGO_NAME_FLAME_.1]  19.56,183.52 0 top
LOGO123  SFE_LOGO_NAME_FLAME.1_INCH  [SFE_LOGO_NAME_FLAME_.1]  19.56,183.52 0 bottom
LOGO124  REVISION  [REVISION]  5.59,140.72 0 top
LOGO125  OSHW-LOGOMINI  [OSHW-LOGO-MINI]  38.23,166.75 0 bottom
LOGO126  SFE_LOGO_NAME_FLAME.1_INCH  [SFE_LOGO_NAME_FLAME_.1]  45.47,183.52 0 top
LOGO127  SFE_LOGO_NAME_FLAME.1_INCH  [SFE_LOGO_NAME_FLAME_.1]  45.47,183.52 0 bottom
LOGO128  REVISION  [REVISION]  31.5,140.72 0 top
LOGO129  OSHW-LOGOMINI  [OSHW-LOGO-MINI]  64.14,166.75 0 bottom
LOGO130  SFE_LOGO_NAME_FLAME.1_INCH  [SFE_LOGO_NAME_FLAME_.1]  71.37,183.52 0 top
LOGO131  SFE_LOGO_NAME_FLAME.1_INCH  [SFE_LOGO_NAME_FLAME_.1]  71.37,183.52 0 bottom
LOGO132  REVISION  [REVISION]  57.4,140.72 0 top
LOGO133  OSHW-LOGOMINI  [OSHW-LOGO-MINI]  90.04,166.75 0 bottom
LOGO134  SFE_LOGO_NAME_FLAME.1_INCH  [SFE_LOGO_NAME_FLAME_.1]  97.28,183.52 0 top
LOGO135  SFE_LOGO_NAME_FLAME.1_INCH  [SFE_LOGO_NAME_FLAME_.1]  97.28,183.52 0 bottom
LOGO136  REVISION  [REVISION]  83.31,140.72 0 top
LOGO137  OSHW-LOGOMINI  [OSHW-LOGO-MINI]  115.95,166.75 0 bottom
LOGO138  SFE_LOGO_NAME_FLAME.1_INCH  [SFE_LOGO_NAME_FLAME_.1]  123.19,183.52 0 top
LOGO139  SFE_LOGO_NAME_FLAME.1_INCH  [SFE_LOGO_NAME_FLAME_.1]  123.19,183.52 0 bottom
LOGO140  REVISION  [REVISION]  109.22,140.72 0 top
PWRLED  JUMPER-SMT_2_NC_TRACE_SILK  [SMT-JUMPER_2_NC_TRACE_SILK]  12.95,10.03 270 top
PWRLED1  JUMPER-SMT_2_NC_TRACE_SILK  [SMT-JUMPER_2_NC_TRACE_SILK]  38.86,10.03 270 top
PWRLED2  JUMPER-SMT_2_NC_TRACE_SILK  [SMT-JUMPER_2_NC_TRACE_SILK]  64.77,10.03 270 top
PWRLED3  JUMPER-SMT_2_NC_TRACE_SILK  [SMT-JUMPER_2_NC_TRACE_SILK]  90.68,10.03 270 top
PWRLED4  JUMPER-SMT_2_NC_TRACE_SILK  [SMT-JUMPER_2_NC_TRACE_SILK]  116.59,10.03 270 top
PWRLED5  JUMPER-SMT_2_NC_TRACE_SILK  [SMT-JUMPER_2_NC_TRACE_SILK]  12.95,35.94 270 top
PWRLED6  JUMPER-SMT_2_NC_TRACE_SILK  [SMT-JUMPER_2_NC_TRACE_SILK]  38.86,35.94 270 top
PWRLED7  JUMPER-SMT_2_NC_TRACE_SILK  [SMT-JUMPER_2_NC_TRACE_SILK]  64.77,35.94 270 top
PWRLED8  JUMPER-SMT_2_NC_TRACE_SILK  [SMT-JUMPER_2_NC_TRACE_SILK]  90.68,35.94 270 top
PWRLED9  JUMPER-SMT_2_NC_TRACE_SILK  [SMT-JUMPER_2_NC_TRACE_SILK]  116.59,35.94 270 top
PWRLED10  JUMPER-SMT_2_NC_TRACE_SILK  [SMT-JUMPER_2_NC_TRACE_SILK]  12.95,61.85 270 top
PWRLED11  JUMPER-SMT_2_NC_TRACE_SILK  [SMT-JUMPER_2_NC_TRACE_SILK]  38.86,61.85 270 top
PWRLED12  JUMPER-SMT_2_NC_TRACE_SILK  [SMT-JUMPER_2_NC_TRACE_SILK]  64.77,61.85 270 top
PWRLED13  JUMPER-SMT_2_NC_TRACE_SILK  [SMT-JUMPER_2_NC_TRACE_SILK]  90.68,61.85 270 top
PWRLED14  JUMPER-SMT_2_NC_TRACE_SILK  [SMT-JUMPER_2_NC_TRACE_SILK]  116.59,61.85 270 top
PWRLED15  JUMPER-SMT_2_NC_TRACE_SILK  [SMT-JUMPER_2_NC_TRACE_SILK]  12.95,87.76 270 top
PWRLED16  JUMPER-SMT_2_NC_TRACE_SILK  [SMT-JUMPER_2_NC_TRACE_SILK]  38.86,87.76 270 top
PWRLED17  JUMPER-SMT_2_NC_TRACE_SILK  [SMT-JUMPER_2_NC_TRACE_SILK]  64.77,87.76 270 top
PWRLED18  JUMPER-SMT_2_NC_TRACE_SILK  [SMT-JUMPER_2_NC_TRACE_SILK]  90.68,87.76 270 top
PWRLED19  JUMPER-SMT_2_NC_TRACE_SILK  [SMT-JUMPER_2_NC_TRACE_SILK]  116.59,87.76 270 top
PWRLED20  JUMPER-SMT_2_NC_TRACE_SILK  [SMT-JUMPER_2_NC_TRACE_SILK]  12.95,113.67 270 top
PWRLED21  JUMPER-SMT_2_NC_TRACE_SILK  [SMT-JUMPER_2_NC_TRACE_SILK]  38.86,113.67 270 top
PWRLED22  JUMPER-SMT_2_NC_TRACE_SILK  [SMT-JUMPER_2_NC_TRACE_SILK]  64.77,113.67 270 top
PWRLED23  JUMPER-SMT_2_NC_TRACE_SILK  [SMT-JUMPER_2_NC_TRACE_SILK]  90.68,113.67 270 top
PWRLED24  JUMPER-SMT_2_NC_TRACE_SILK  [SMT-JUMPER_2_NC_TRACE_SILK]  116.59,113.67 270 top
PWRLED25  JUMPER-SMT_2_NC_TRACE_SILK  [SMT-JUMPER_2_NC_TRACE_SILK]  12.95,139.57 270 top
PWRLED26  JUMPER-SMT_2_NC_TRACE_SILK  [SMT-JUMPER_2_NC_TRACE_SILK]  38.86,139.57 270 top
PWRLED27  JUMPER-SMT_2_NC_TRACE_SILK  [SMT-JUMPER_2_NC_TRACE_SILK]  64.77,139.57 270 top
PWRLED28  JUMPER-SMT_2_NC_TRACE_SILK  [SMT-JUMPER_2_NC_TRACE_SILK]  90.68,139.57 270 top
PWRLED29  JUMPER-SMT_2_NC_TRACE_SILK  [SMT-JUMPER_2_NC_TRACE_SILK]  116.59,139.57 270 top
PWRLED30  JUMPER-SMT_2_NC_TRACE_SILK  [SMT-JUMPER_2_NC_TRACE_SILK]  12.95,165.48 270 top
PWRLED31  JUMPER-SMT_2_NC_TRACE_SILK  [SMT-JUMPER_2_NC_TRACE_SILK]  38.86,165.48 270 top
PWRLED32  JUMPER-SMT_2_NC_TRACE_SILK  [SMT-JUMPER_2_NC_TRACE_SILK]  64.77,165.48 270 top
PWRLED33  JUMPER-SMT_2_NC_TRACE_SILK  [SMT-JUMPER_2_NC_TRACE_SILK]  90.68,165.48 270 top
PWRLED34  JUMPER-SMT_2_NC_TRACE_SILK  [SMT-JUMPER_2_NC_TRACE_SILK]  116.59,165.48 270 top
R1  2.2k  [0603]  19.68,24.13 180 top
R2  2.2k  [0603]  19.68,25.91 180 top
R3  1k  [0603]  12.95,12.45 0 top
R4  1k  [0603]  38.86,12.45 0 top
R5  2.2k  [0603]  45.59,24.13 180 top
R6  2.2k  [0603]  45.59,25.91 180 top
R7  1k  [0603]  64.77,12.45 0 top
R8  2.2k  [0603]  71.5,24.13 180 top
R9  2.2k  [0603]  71.5,25.91 180 top
R10  1k  [0603]  90.68,12.45 0 top
R11  2.2k  [0603]  97.41,24.13 180 top
R12  2.2k  [0603]  97.41,25.91 180 top
R13  1k  [0603]  116.59,12.45 0 top
R14  2.2k  [0603]  123.32,24.13 180 top
R15  2.2k  [0603]  123.32,25.91 180 top
R16  1k  [0603]  12.95,38.35 0 top
R17  2.2k  [0603]  19.68,50.04 180 top
R18  2.2k  [0603]  19.68,51.82 180 top
R19  1k  [0603]  38.86,38.35 0 top
R20  2.2k  [0603]  45.59,50.04 180 top
R21  2.2k  [0603]  45.59,51.82 180 top
R22  1k  [0603]  64.77,38.35 0 top
R23  2.2k  [0603]  71.5,50.04 180 top
R24  2.2k  [0603]  71.5,51.82 180 top
R25  1k  [0603]  90.68,38.35 0 top
R26  2.2k  [0603]  97.41,50.04 180 top
R27  2.2k  [0603]  97.41,51.82 180 top
R28  1k  [0603]  116.59,38.35 0 top
R29  2.2k  [0603]  123.32,50.04 180 top
R30  2.2k  [0603]  123.32,51.82 180 top
R31  1k  [0603]  12.95,64.26 0 top
R32  2.2k  [0603]  19.68,75.95 180 top
R33  2.2k  [0603]  19.68,77.72 180 top
R34  1k  [0603]  38.86,64.26 0 top
R35  2.2k  [0603]  45.59,75.95 180 top
R36  2.2k  [0603]  45.59,77.72 180 top
R37  1k  [0603]  64.77,64.26 0 top
R38  2.2k  [0603]  71.5,75.95 180 top
R39  2.2k  [0603]  71.5,77.72 180 top
R40  1k  [0603]  90.68,64.26 0 top
R41  2.2k  [0603]  97.41,75.95 180 top
R42  2.2k  [0603]  97.41,77.72 180 top
R43  1k  [0603]  116.59,64.26 0 top
R44  2.2k  [0603]  123.32,75.95 180 top
R45  2.2k  [0603]  123.32,77.72 180 top
R46  1k  [0603]  12.95,90.17 0 top
R47  2.2k  [0603]  19.68,101.85 180 top
R48  2.2k  [0603]  19.68,103.63 180 top
R49  1k  [0603]  38.86,90.17 0 top
R50  2.2k  [0603]  45.59,101.85 180 top
R51  2.2k  [0603]  45.59,103.63 180 top
R52  1k  [0603]  64.77,90.17 0 top
R53  2.2k  [0603]  71.5,101.85 180 top
R54  2.2k  [0603]  71.5,103.63 180 top
R55  1k  [0603]  90.68,90.17 0 top
R56  2.2k  [0603]  97.41,101.85 180 top
R57  2.2k  [0603]  97.41,103.63 180 top
R58  1k  [0603]  116.59,90.17 0 top
R59  2.2k  [0603]  123.32,101.85 180 top
R60  2.2k  [0603]  123.32,103.63 180 top
R61  1k  [0603]  12.95,116.08 0 top
R62  2.2k  [0603]  19.68,127.76 180 top
R63  2.2k  [0603]  19.68,129.54 180 top
R64  1k  [0603]  38.86,116.08 0 top
R65  2.2k  [0603]  45.59,127.76 180 top
R66  2.2k  [0603]  45.59,129.54 180 top
R67  1k  [0603]  64.77,116.08 0 top
R68  2.2k  [0603]  71.5,127.76 180 top
R69  2.2k  [0603]  71.5,129.54 180 top
R70  1k  [0603]  90.68,116.08 0 top
R71  2.2k  [0603]  97.41,127.76 180 top
R72  2.2k  [0603]  97.41,129.54 180 top
R73  1k  [0603]  116.59,116.08 0 top
R74  2.2k  [0603]  123.32,127.76 180 top
R75  2.2k  [0603]  123.32,129.54 180 top
R76  1k  [0603]  12.95,141.99 0 top
R77  2.2k  [0603]  19.68,153.67 180 top
R78  2.2k  [0603]  19.68,155.45 180 top
R79  1k  [0603]  38.86,141.99 0 top
R80  2.2k  [0603]  45.59,153.67 180 top
R81  2.2k  [0603]  45.59,155.45 180 top
R82  1k  [0603]  64.77,141.99 0 top
R83  2.2k  [0603]  71.5,153.67 180 top
R84  2.2k  [0603]  71.5,155.45 180 top
R85  1k  [0603]  90.68,141.99 0 top
R86  2.2k  [0603]  97.41,153.67 180 top
R87  2.2k  [0603]  97.41,155.45 180 top
R88  1k  [0603]  116.59,141.99 0 top
R89  2.2k  [0603]  123.32,153.67 180 top
R90  2.2k  [0603]  123.32,155.45 180 top
R91  1k  [0603]  12.95,167.89 0 top
R92  2.2k  [0603]  19.68,179.58 180 top
R93  2.2k  [0603]  19.68,181.36 180 top
R94  1k  [0603]  38.86,167.89 0 top
R95  2.2k  [0603]  45.59,179.58 180 top
R96  2.2k  [0603]  45.59,181.36 180 top
R97  1k  [0603]  64.77,167.89 0 top
R98  2.2k  [0603]  71.5,179.58 180 top
R99  2.2k  [0603]  71.5,181.36 180 top
R100  1k  [0603]  90.68,167.89 0 top
R101  2.2k  [0603]  97.41,179.58 180 top
R102  2.2k  [0603]  97.41,181.36 180 top
R103  1k  [0603]  116.59,167.89 0 top
R104  2.2k  [0603]  123.32,179.58 180 top
R105  2.2k  [0603]  123.32,181.36 180 top
U1  SHTC3  [SHTC3]  19.68,19.05 0 top
U2  SHTC3  [SHTC3]  45.59,19.05 0 top
U3  SHTC3  [SHTC3]  71.5,19.05 0 top
U4  SHTC3  [SHTC3]  97.41,19.05 0 top
U5  SHTC3  [SHTC3]  123.32,19.05 0 top
U6  SHTC3  [SHTC3]  19.68,44.96 0 top
U7  SHTC3  [SHTC3]  45.59,44.96 0 top
U8  SHTC3  [SHTC3]  71.5,44.96 0 top
U9  SHTC3  [SHTC3]  97.41,44.96 0 top
U10  SHTC3  [SHTC3]  123.32,44.96 0 top
U11  SHTC3  [SHTC3]  19.68,70.87 0 top
U12  SHTC3  [SHTC3]  45.59,70.87 0 top
U13  SHTC3  [SHTC3]  71.5,70.87 0 top
U14  SHTC3  [SHTC3]  97.41,70.87 0 top
U15  SHTC3  [SHTC3]  123.32,70.87 0 top
U16  SHTC3  [SHTC3]  19.68,96.77 0 top
U17  SHTC3  [SHTC3]  45.59,96.77 0 top
U18  SHTC3  [SHTC3]  71.5,96.77 0 top
U19  SHTC3  [SHTC3]  97.41,96.77 0 top
U20  SHTC3  [SHTC3]  123.32,96.77 0 top
U21  SHTC3  [SHTC3]  19.68,122.68 0 top
U22  SHTC3  [SHTC3]  45.59,122.68 0 top
U23  SHTC3  [SHTC3]  71.5,122.68 0 top
U24  SHTC3  [SHTC3]  97.41,122.68 0 top
U25  SHTC3  [SHTC3]  123.32,122.68 0 top
U26  SHTC3  [SHTC3]  19.68,148.59 0 top
U27  SHTC3  [SHTC3]  45.59,148.59 0 top
U28  SHTC3  [SHTC3]  71.5,148.59 0 top
U29  SHTC3  [SHTC3]  97.41,148.59 0 top
U30  SHTC3  [SHTC3]  123.32,148.59 0 top
U31  SHTC3  [SHTC3]  19.68,174.5 0 top
U32  SHTC3  [SHTC3]  45.59,174.5 0 top
U33  SHTC3  [SHTC3]  71.5,174.5 0 top
U34  SHTC3  [SHTC3]  97.41,174.5 0 top
U35  SHTC3  [SHTC3]  123.32,174.5 0 top
U$1  [ADDR#_0X700]  24.13,14.48 0 bottom
U$2  [PWR_TO]  10.54,15.49 0 top
U$3  [GND1]  15.75,8.38 90 bottom
U$4  [3#3V2]  18.29,8.38 90 bottom
U$5  [SDA8]  20.83,8.38 90 bottom
U$6  [SCL9]  23.37,8.38 90 bottom
U$7  [SHTC3_HUMIDITY_SENSOR2]  28.57,16.26 0 bottom
U$8  [_SHTC31]  16,16.38 0 top
U$9  [I_SUPER2_C-()-03]  20.98,26.37 0 bottom
U$10  [HUMIDITY2]  15.49,15.11 0 top
U$11  [QWIIC_5.5MM]  28.45,24.64 0 top
U$12  [SENSOR0]  16.26,13.84 0 top
U$13  [3#3V2]  44.2,8.38 90 top
U$14  [GND1]  41.66,8.38 90 top
U$15  [SCL9]  49.28,8.38 90 top
U$16  [SDA8]  46.74,8.38 90 top
U$17  [GND1]  41.66,8.38 90 bottom
U$18  [3#3V2]  44.2,8.38 90 bottom
U$19  [SDA8]  46.74,8.38 90 bottom
U$20  [SCL9]  49.28,8.38 90 bottom
U$21  [3#3V2]  18.29,8.38 90 top
U$22  [GND1]  15.75,8.38 90 top
U$23  [I_SUPER2_C-()-03]  46.89,26.37 0 bottom
U$24  [QWIIC_5.5MM]  54.36,24.64 0 top
U$25  [ADDR#_0X700]  50.04,14.48 0 bottom
U$26  [SCL9]  23.37,8.38 90 top
U$27  [SDA8]  20.83,8.38 90 top
U$28  [PWR_TO]  36.45,15.49 0 top
U$29  [_SHTC31]  41.91,16.38 0 top
U$30  [HUMIDITY2]  41.4,15.11 0 top
U$31  [SENSOR0]  42.16,13.84 0 top
U$32  [SHTC3_HUMIDITY_SENSOR2]  54.48,16.26 0 bottom
U$33  [3#3V2]  70.1,8.38 90 top
U$34  [GND1]  67.56,8.38 90 top
U$35  [SCL9]  75.18,8.38 90 top
U$36  [SDA8]  72.64,8.38 90 top
U$37  [GND1]  67.56,8.38 90 bottom
U$38  [3#3V2]  70.1,8.38 90 bottom
U$39  [SDA8]  72.64,8.38 90 bottom
U$40  [SCL9]  75.18,8.38 90 bottom
U$41  [I_SUPER2_C-()-03]  72.8,26.37 0 bottom
U$42  [QWIIC_5.5MM]  80.26,24.64 0 top
U$43  [ADDR#_0X700]  75.95,14.48 0 bottom
U$44  [PWR_TO]  62.36,15.49 0 top
U$45  [_SHTC31]  67.82,16.38 0 top
U$46  [HUMIDITY2]  67.31,15.11 0 top
U$47  [SENSOR0]  68.07,13.84 0 top
U$48  [SHTC3_HUMIDITY_SENSOR2]  80.39,16.26 0 bottom
U$49  [3#3V2]  96.01,8.38 90 top
U$50  [GND1]  93.47,8.38 90 top
U$51  [SCL9]  101.09,8.38 90 top
U$52  [SDA8]  98.55,8.38 90 top
U$53  [GND1]  93.47,8.38 90 bottom
U$54  [3#3V2]  96.01,8.38 90 bottom
U$55  [SDA8]  98.55,8.38 90 bottom
U$56  [SCL9]  101.09,8.38 90 bottom
U$57  [I_SUPER2_C-()-03]  98.7,26.37 0 bottom
U$58  [QWIIC_5.5MM]  106.17,24.64 0 top
U$59  [ADDR#_0X700]  101.85,14.48 0 bottom
U$60  [PWR_TO]  88.27,15.49 0 top
U$61  [_SHTC31]  93.73,16.38 0 top
U$62  [HUMIDITY2]  93.22,15.11 0 top
U$63  [SENSOR0]  93.98,13.84 0 top
U$64  [SHTC3_HUMIDITY_SENSOR2]  106.3,16.26 0 bottom
U$65  [3#3V2]  121.92,8.38 90 top
U$66  [GND1]  119.38,8.38 90 top
U$67  [SCL9]  127,8.38 90 top
U$68  [SDA8]  124.46,8.38 90 top
U$69  [GND1]  119.38,8.38 90 bottom
U$70  [3#3V2]  121.92,8.38 90 bottom
U$71  [SDA8]  124.46,8.38 90 bottom
U$72  [SCL9]  127,8.38 90 bottom
U$73  [I_SUPER2_C-()-03]  124.61,26.37 0 bottom